# Allegro board scm.brd
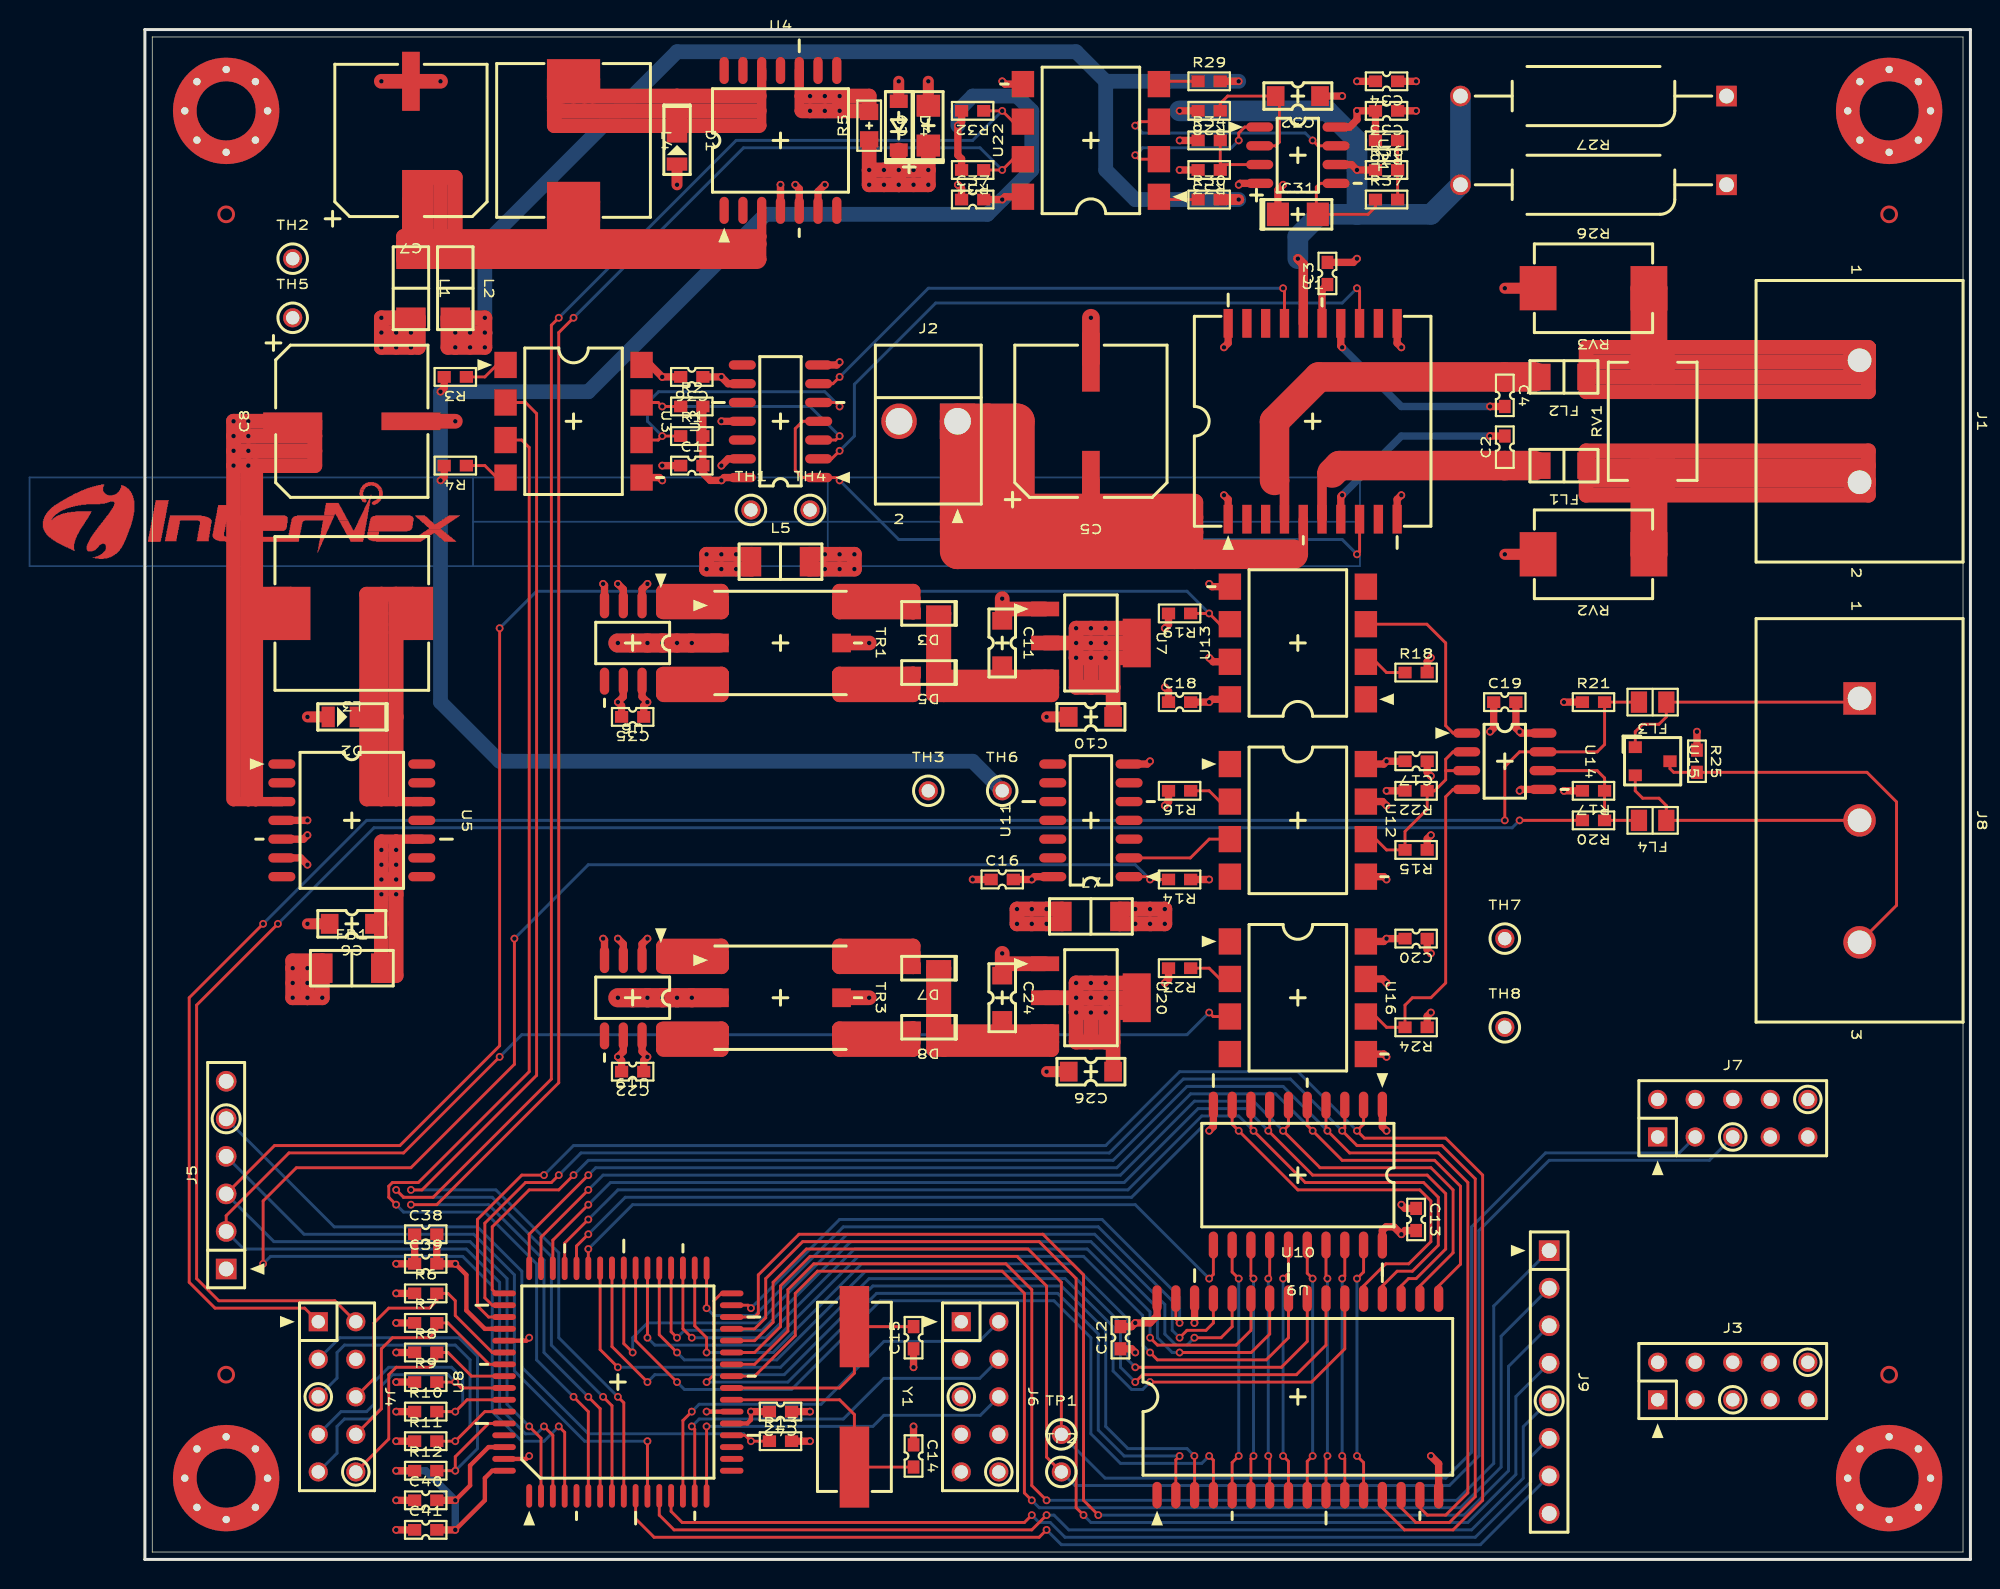
[diagram p0: board, top side]
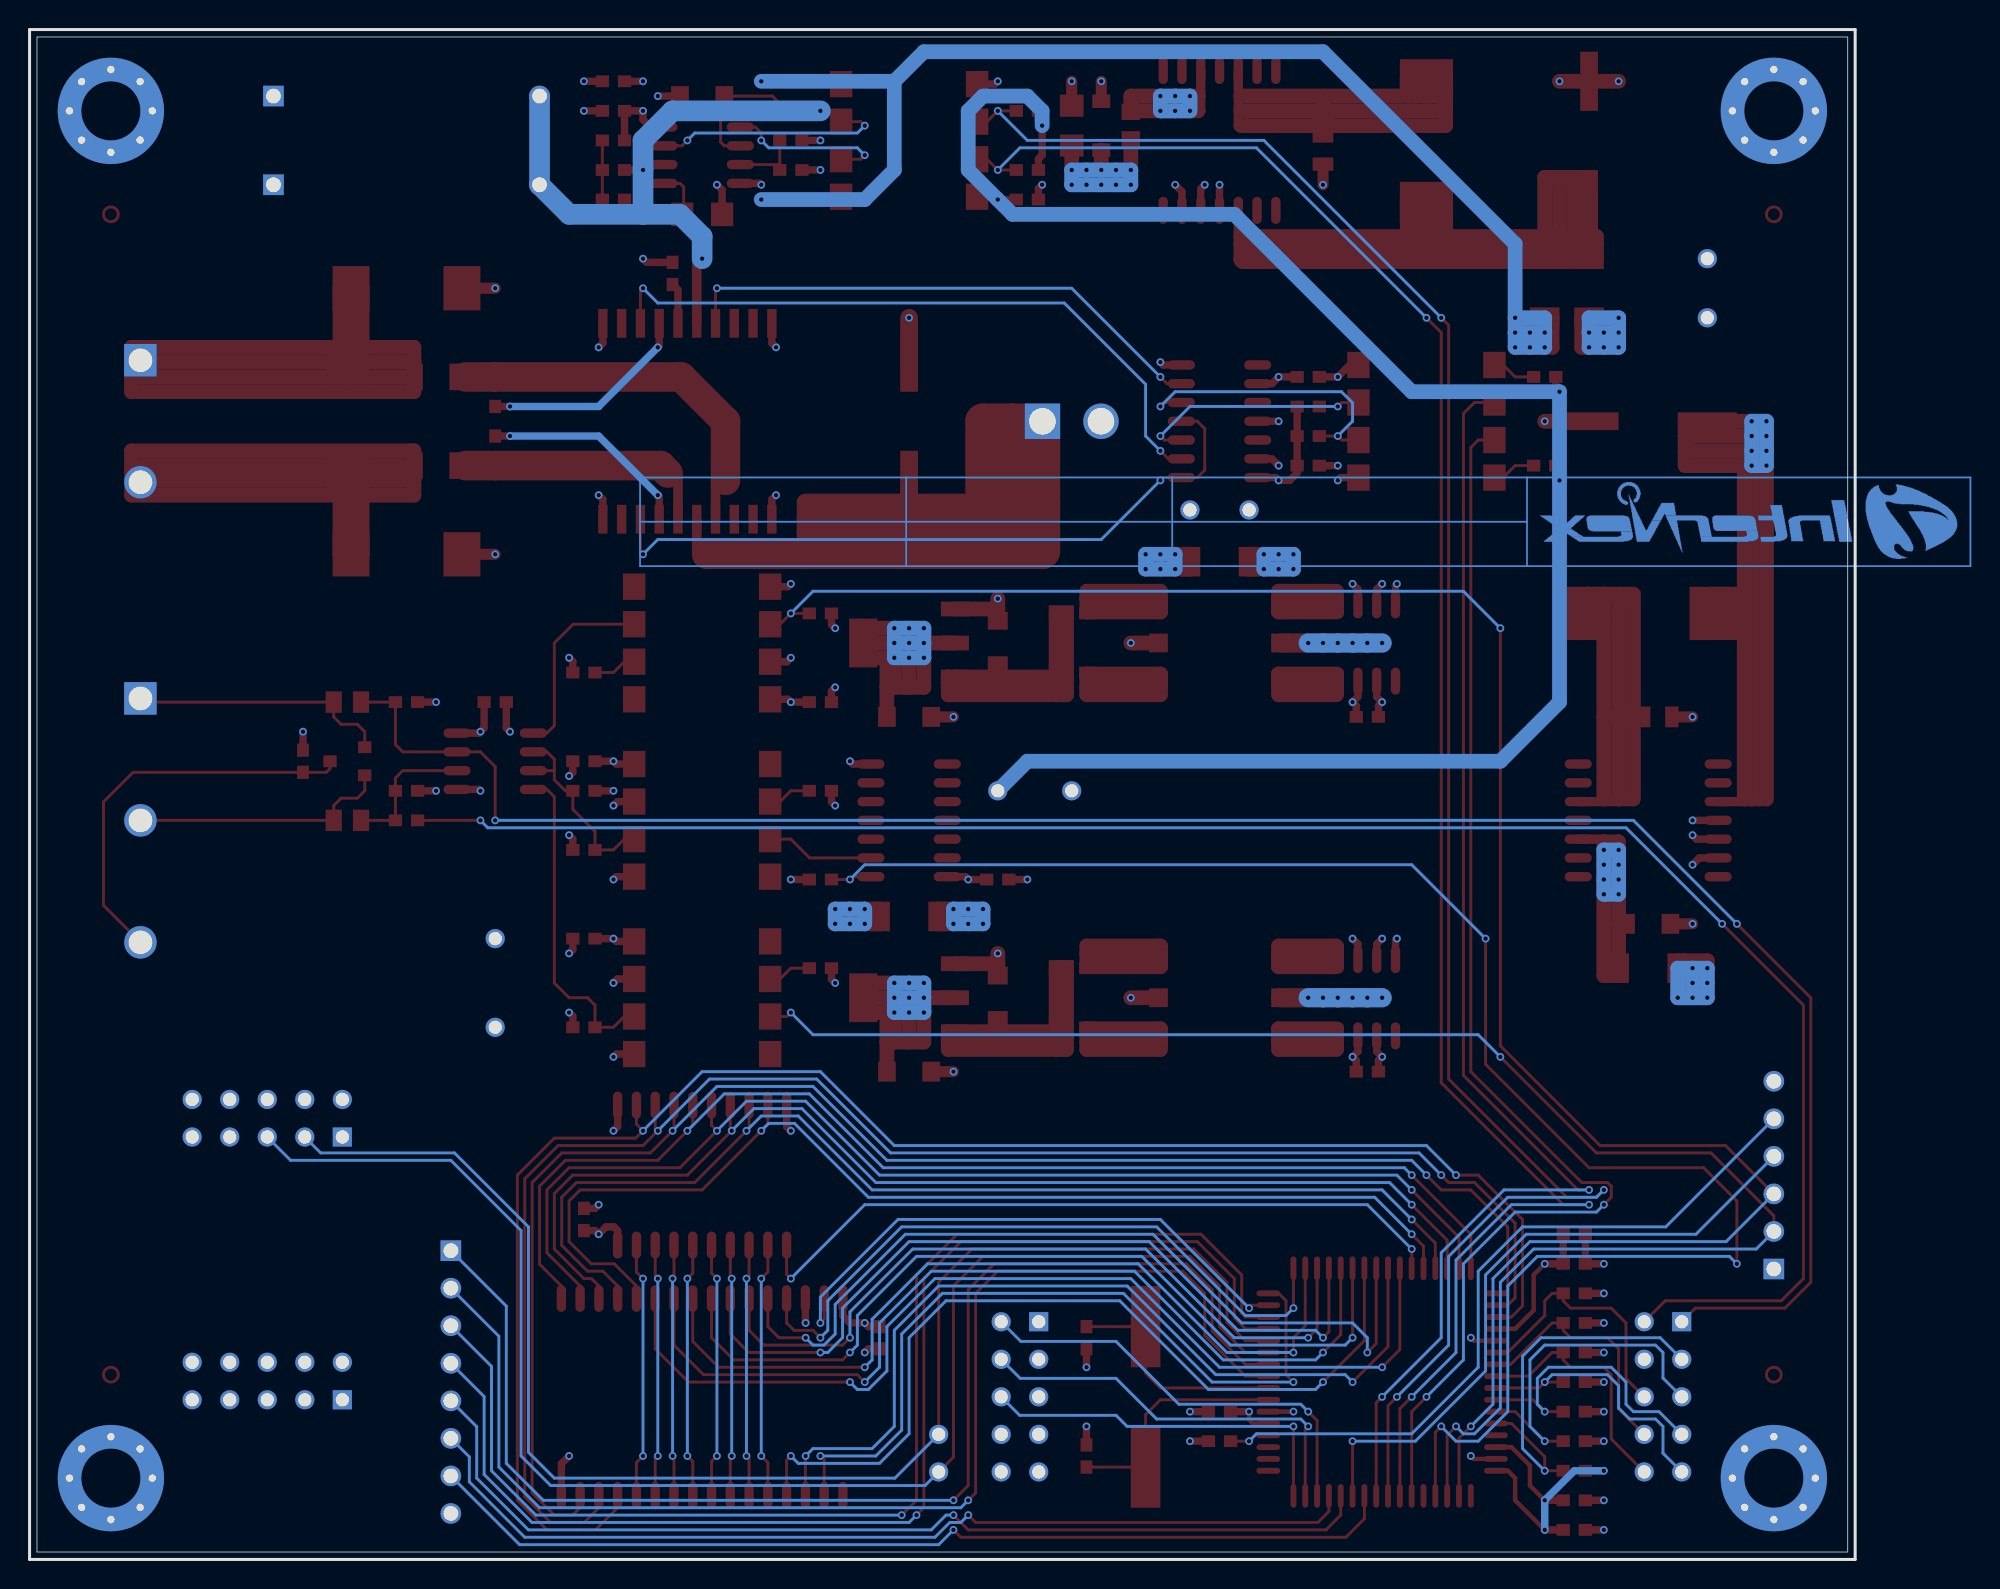
[diagram p1: board, bottom side, seen from below]

Outline 123.5 x 103.5 mm; copper layers: TOP, SIGNAL_2, SIGNAL_3, BOTTOM. Coordinates in mm from the lower left corner of the outline.
Outline path: 0,103.5 0,0 123.5,0 123.5,103.5 0,103.5 ; 0.5,103 123,103 123,0.5 0.5,0.5 0.5,103

## Placement (name value [footprint] x y rotation side)
C1  -  [CC1608]  37 74 0 top
C2  -  [CC1608]  92 75.25 90 top
C3  -  [CC1608]  80 87 90 top
C4  -  [CC1608]  92 78.75 270 top
C5  -  [CAP10D]  64 77 180 top
C6  -  [CC3216]  14 43 180 top
C7  -  [CAP10D]  18 96 180 top
C8  -  [CAP10D]  14 77 90 top
C9  -  [TC3216]  53 97 90 top
C10  -  [CC3216]  64 57 180 top
C11  -  [CC3216]  58 62 270 top
C12  -  [CC1608]  66 15 90 top
C13  -  [CC1608]  86 23 270 top
C14  -  [CC1608]  52 7 270 top
C15  -  [CC1608]  52 15 90 top
C16  -  [CC1608]  58 46 0 top
C17  -  [CC1608]  86 54 180 top
C18  -  [CC1608]  70 58 0 top
C19  -  [CC1608]  92 58 0 top
C20  -  [CC1608]  86 42 180 top
C22  -  [CC1608]  33 33 180 top
C24  -  [CC3216]  58 38 270 top
C26  -  [CC3216]  64 33 180 top
C31  -  [TC3216]  78 91 0 top
C32  -  [CC3216]  78 99 180 top
C33  -  [CC1608]  84 98 180 top
C34  -  [CC1608]  84 100 180 top
C35  -  [CC1608]  33 57 180 top
C36  -  [CC1608]  37 80 180 top
C37  -  [CC1608]  56 92 0 top
C38  -  [CC1608]  19 22 0 top
C39  -  [CC1608]  19 20 0 top
C40  -  [CC1608]  19 4 0 top
C41  -  [CC1608]  19 2 0 top
C42  -  [CC1608]  43 10 180 top
D1  -  [POWERDI123]  36 96 270 top
D2  -  [POWERDI123]  14 57 180 top
D3  -  [MICROSMP]  53 64 180 top
D4  -  [SOD-123]  51 97 270 top
D5  -  [MICROSMP]  53 60 180 top
D7  -  [MICROSMP]  53 40 180 top
D8  -  [MICROSMP]  53 36 180 top
FB1  -  [BEAD4516]  14 40 0 top
FL1  -  [BEAD3216]  96 74 180 top
FL2  -  [BEAD3216]  96 80 180 top
FL3  -  [BEAD2012]  102 58 180 top
FL4  -  [BEAD2012]  102 50 180 top
J1  -  [OSTYK41202030]  116 77 270 top
J2  -  [5273-02]  53 77 0 top
J3  -  [76342-305LF]  107.42 12.07 0 top
J4  -  [76342-305LF]  13 11 270 top
J5  -  [HEADER6_2_5MM_S]  5.5 26 90 top
J6  -  [76342-305LF]  56.5 11 270 top
J7  -  [76342-305LF]  107.42 29.85 0 top
J8  -  [OSTYK41203030]  116 50 270 top
J9  -  [HEADER8]  95 12 270 top
L1  -  [BEAD4516]  18 86 270 top
L2  -  [BEAD4516]  21 86 270 top
L3  -  [B82464A4]  14 64 180 top
L4  -  [B82464A4]  29 96 270 top
L5  -  [BEAD4516]  43 67.5 0 top
L7  -  [BEAD4516]  64 43.5 0 top
MH1  -  [MHOLE3_0]  5.5 98 0 top
MH2  -  [MHOLE3_0]  118 98 0 top
MH3  -  [MHOLE3_0]  5.5 5.5 0 top
MH4  -  [MHOLE3_0]  118 5.5 0 top
NOREF  -  []  118 91 0 top
NOREF#2  -  []  118 12.5 0 top
NOREF#3  -  []  5.5 91 0 top
NOREF#4  -  []  5.5 12.5 0 top
R1  -  [RC1608]  37 76 0 top
R2  -  [RC1608]  37 78 0 top
R3  -  [RC1608]  21 80 180 top
R4  -  [RC1608]  21 74 180 top
R5  -  [RC2012]  49 97 90 top
R6  -  [RC1608]  19 18 0 top
R7  -  [RC1608]  19 16 0 top
R8  -  [RC1608]  19 14 0 top
R9  -  [RC1608]  19 12 0 top
R10  -  [RC1608]  19 10 0 top
R11  -  [RC1608]  19 8 0 top
R12  -  [RC1608]  19 6 0 top
R13  -  [RC1608]  43 8 0 top
R14  -  [RC1608]  70 46 180 top
R15  -  [RC1608]  86 48 180 top
R16  -  [RC1608]  70 52 180 top
R17  -  [RC1608]  98 52 180 top
R18  -  [RC1608]  86 60 0 top
R19  -  [RC1608]  70 64 180 top
R20  -  [RC1608]  98 50 180 top
R21  -  [RC1608]  98 58 0 top
R22  -  [RC1608]  86 52 180 top
R23  -  [RC1608]  70 40 180 top
R24  -  [RC1608]  86 36 180 top
R25  -  [RC1608]  105 54 270 top
R26  -  [MOR-1W]  98 93 180 top
R27  -  [MOR-1W]  98 99 180 top
R28  -  [RC1608]  72 98 180 top
R29  -  [RC1608]  72 100 0 top
R30  -  [RC1608]  72 92 0 top
R31  -  [RC1608]  56 94 180 top
R32  -  [RC1608]  56 98 180 top
R33  -  [RC1608]  72 94 180 top
R34  -  [RC1608]  72 96 0 top
R35  -  [RC1608]  84 96 180 top
R36  -  [RC1608]  84 94 0 top
R37  -  [RC1608]  84 92 0 top
RV1  -  [ERZVF2M]  102 77 90 top
RV2  -  [ERZVF2M]  98 68 180 top
RV3  -  [ERZVF2M]  98 86 180 top
TH1  -  [TP0_9]  41 71 0 top
TH2  -  [TP0_9]  10 88 0 top
TH3  -  [TP0_9]  53 52 0 top
TH4  -  [TP0_9]  45 71 0 top
TH5  -  [TP0_9]  10 84 0 top
TH6  -  [TP0_9]  58 52 0 top
TH7  -  [TP0_9]  92 42 0 top
TH8  -  [TP0_9]  92 36 0 top
TP1  -  [TP0_9]  62 8.46 0 top
TP2  -  [TP0_9]  62 5.92 0 top
TR1  -  [Q4470-CL]  43 62 270 top
TR3  -  [Q4470-CL]  43 38 270 top
U1  -  [POWERSO20]  79 77 0 top
U2  -  [SOP14_3_9_6_1_27]  43 77 90 top
U3  -  [SMD-8]  29 77 270 top
U4  -  [SOP14_7_5_10_3_1_27]  43 96 0 top
U5  -  [SOP14_7_5_10_3_1_27]  14 50 270 top
U6  -  [SOP8_3_9_6_1_27]  33 62 180 top
U7  -  [SOT-223]  64 62 270 top
U8  -  [QFP64_14_16_0_8]  32 12 90 top
U9  -  [SOP20_7_5_10_3_1_27]  78 26 180 top
U10  -  [SOP32_11_4_14_1_1_27]  78 11 0 top
U11  -  [SOP14_3_9_6_1_27]  64 50 90 top
U12  -  [SMD-8]  78 50 270 top
U13  -  [SMD-8]  78 62 90 top
U14  -  [SOP8_3_9_6_1_27]  92 54 270 top
U15  -  [SOT-23]  102 54 270 top
U16  -  [SMD-8]  78 38 270 top
U19  -  [SOP8_3_9_6_1_27]  33 38 180 top
U20  -  [SOT-223]  64 38 270 top
U21  -  [SOP8_3_9_6_1_27]  78 95 270 top
U22  -  [SMD-8]  64 96 90 top
Y1  -  [SX-1]  48 11 270 top

## Library data of the parts
C1 C12 C13 C16-C20 C22 C33-C42 = 0_1U_0603: alternate symbols: (B:CC1608_ALT)
C2 C4 = 10N_0603: alternate symbols: (B:CC1608_ALT)
C3 = 220N_0603: alternate symbols: (B:CC1608_ALT)
C5 C7 C8 = EEE-1VA331P: alternate symbols: (B:CAP10D_ALT)
C6 = 22UF_1206: alternate symbols: (B:CC3216_ALT)
C9 = TANTAL_6_8UF_3216: alternate symbols: (B:TC3216_ALT)
C10 C11 C24 C26 C32 = 10U_1206: alternate symbols: (B:CC3216_ALT)
C14 C15 = 15P_0603: alternate symbols: (B:CC1608_ALT)
C31 = TCSCS1C685MAAR: alternate symbols: (B:TC3216_ALT)
D1 D2 = DFLS160-7: alternate symbols: (B:POWERDI123_ALT)
D3 D5 D7 D8 = MSS1P2L-M3_89A: alternate symbols: (B:MICROSMP_ALT)
D4 = MMSZ4699T1G_12V: alternate symbols: (B:SOD-123_ALT)
FB1 = BLM41PG181SN1: alternate symbols: (B:BEAD4516_ALT)
FL1 FL2 = BLM31PG601SN1L: alternate symbols: (B:BEAD3216_ALT)
FL3 FL4 = MMZ2012R150A: alternate symbols: (B:BEAD2012_ALT)
J1 = OSTYK41202030: alternate symbols: (B:OSTYK41202030_ALT)
J2 = 09-65-2028: alternate symbols: (B:5273-02_ALT)
J3 J4 J6 J7 = 76342-305LF: alternate symbols: (B:76342-305LF_ALT)
J5 = PH01_2_54_-SS40P-11_5MM: alternate symbols: (B:HEADER6_2_5MM_S_ALT)
J8 = OSTYK41203030: alternate symbols: (B:OSTYK41203030_ALT)
J9 = HEADER_2_54MM_DNI: alternate symbols: (B:HEADER8_ALT)
L1 L2 L5 L7 = BLM41PG750SN1: alternate symbols: (B:BEAD4516_ALT)
L3 L4 = B82464A4474K: alternate symbols: (B:B82464A4_ALT)
MH1-MH4 = HOLE_MOUNT: alternate symbols: (B:MHOLE3_0_ALT)
R1 R2 R15 R17 R19 R21 R22 R24 R31 R32 = 4_7K_0603: alternate symbols: (B:RC1608_ALT)
R3 R4 R16 R18 R23 R29 R30 = 470_0603: alternate symbols: (B:RC1608_ALT)
R5 = 2_7K_0805: alternate symbols: (B:RC2012_ALT)
R6-R14 R28 R37 = 10K_0603: alternate symbols: (B:RC1608_ALT)
R20 = 120_0603: alternate symbols: (B:RC1608_ALT)
R25 = 0_0603: alternate symbols: (B:RC1608_ALT)
R26 R27 = MOR_1W_5__1OHM: alternate symbols: (B:MOR-1W_ALT)
R33 = 16K_0603: alternate symbols: (B:RC1608_ALT)
R34 = 1K_0603: alternate symbols: (B:RC1608_ALT)
R35 = 47K_0603: alternate symbols: (B:RC1608_ALT)
R36 = 200_0603: alternate symbols: (B:RC1608_ALT)
RV1-RV3 = ERZVF2M470: alternate symbols: (B:ERZVF2M_ALT)
TH1-TH3 TH7 = GND: alternate symbols: (B:TP0_9_ALT)
TH4 = SMPS24V: alternate symbols: (B:TP0_9_ALT)
TH5 = 5VP_IN: alternate symbols: (B:TP0_9_ALT)
TH6 = 5VL1: alternate symbols: (B:TP0_9_ALT)
TH8 = 5VL3: alternate symbols: (B:TP0_9_ALT)
TP1 = TXD: alternate symbols: (B:TP0_9_ALT)
TP2 = RXD: alternate symbols: (B:TP0_9_ALT)
TR1 TR3 = Q4470-CL: alternate symbols: (B:Q4470-CL_ALT)
U1 = L6201PS_POWERSO20: alternate symbols: (B:POWERSO20_ALT)
U2 U11 = MM74HC04M: alternate symbols: (B:SOP14_3_9_6_1_27_ALT)
U3 U22 = HCPL2630S: alternate symbols: (B:SMD-8_ALT)
U4 U5 = LM2574HVM-5_0: alternate symbols: (B:SOP14_7_5_10_3_1_27_ALT)
U6 U19 = MAX253ESA: alternate symbols: (B:SOP8_3_9_6_1_27_ALT)
U7 U20 = LM1117IMPX-5_0: alternate symbols: (B:SOT-223_ALT)
U8 = ATMEGA128-16AU: alternate symbols: (B:QFP64_14_16_0_8_ALT)
U9 = SN74HC573ADW: alternate symbols: (B:SOP20_7_5_10_3_1_27_ALT)
U10 = R1LP0108ESP-7SI_B0: alternate symbols: (B:SOP32_11_4_14_1_1_27_ALT)
U12 U13 U16 = 6N137S: alternate symbols: (B:SMD-8_ALT)
U14 = SN65176BD: alternate symbols: (B:SOP8_3_9_6_1_27_ALT)
U15 = SM712-TP: alternate symbols: (B:SOT-23_ALT)
U21 = LM2903D_SOIC: alternate symbols: (B:SOP8_3_9_6_1_27_ALT)
Y1 = SX-1_8MHZ_: alternate symbols: (B:SX-1_ALT)

## Footprints (pads in the part's own frame, mm; a bottom-side part is the same pattern mirrored in y, then rotated)
5273-02
  rect 2.4x2.4 hole 1.8: 1(1.98,0)
  round 2.4 hole 1.8: 2(-1.98,0)
76342-305LF
  rect 1.3x1.3 hole 0.9: 1(-5.08,-1.27)
  round 1.3 hole 0.9: 2(-5.08,1.27) 3(-2.54,-1.27) 4(-2.54,1.27) 5(0,-1.27) 6(0,1.27) 7(2.54,-1.27) 8(2.54,1.27) 9(5.08,-1.27) 10(5.08,1.27)
B82464A4
  rect 2.7x3.6 smd: 1(-4.15,0) 2(4.15,0)
BEAD2012
  rect 1.1x1.45 smd: 1(-0.925,0) 2(0.925,0)
BEAD3216
  rect 1.2x1.8 smd: 1(-1.5,0) 2(1.5,0)
BEAD4516
  rect 1.3x2 smd: 1(-1.95,0) 2(1.95,0)
CAP10D
  rect 1.2x4 smd: 1(0,4) 2(0,-4)
CC1608
  rect 0.9x0.8 smd: 1(-0.75,0) 2(0.75,0)
CC3216
  rect 1.2x1.35 smd: 1(-1.5,0) 2(1.5,0)
ERZVF2M
  rect 2.5x3 smd: 1(-3.75,0) 2(3.75,0)
HEADER6_2_5MM_S
  rect 1.4x1.4 hole 1: 1(-6.35,0)
  round 1.4 hole 1: 2(-3.81,0) 3(-1.27,0) 4(1.27,0) 5(3.81,0) 6(6.35,0)
HEADER8
  rect 1.4x1.4 hole 1: 1(-8.89,0)
  round 1.4 hole 1: 2(-6.35,0) 3(-3.81,0) 4(-1.27,0) 5(1.27,0) 6(3.81,0) 7(6.35,0) 8(8.89,0)
MHOLE3_0
  round 0.9 hole 0.5: 1(2.8,0) 2(1.98,1.98) 3(0,2.8) 4(-1.98,1.98) 5(-2.8,0) 6(-1.98,-1.98) 7(0,-2.8) 8(1.98,-1.98)
MICROSMP
  rect 1.7x1.1 smd: 1(-0.7,0)
  rect 1.05x0.8 smd: 2(1.025,0)
MOR-1W
  rect 1.4x1.4 hole 1: 1(-9,0)
  round 1.4 hole 1: 2(9,0)
OSTYK41202030
  rect 2.2x2.2 hole 1.6: 1(-4.125,0)
  round 2.2 hole 1.6: 2(4.125,0)
OSTYK41203030
  rect 2.2x2.2 hole 1.6: 1(-8.25,0)
  round 2.2 hole 1.6: 2(0,0) 3(8.25,0)
POWERDI123
  rect 0.9x1.4 smd: 1(1.6,0)
  rect 2.2x1.4 smd: 2(-0.95,0)
POWERSO20
  rect 0.635x1.95 smd: 1(-5.715,-6.625) 2(-4.445,-6.625) 3(-3.175,-6.625) 4(-1.905,-6.625) 5(-0.635,-6.625) 6(0.635,-6.625) 7(1.905,-6.625) 8(3.175,-6.625) 9(4.445,-6.625) 10(5.715,-6.625) 11(5.715,6.625) 12(4.445,6.625) 13(3.175,6.625) 14(1.905,6.625) 15(0.635,6.625) 16(-0.635,6.625) 17(-1.905,6.625) 18(-3.175,6.625) 19(-4.445,6.625) 20(-5.715,6.625)
Q4470-CL
  rect 1.27x1.27 smd: 1(-2.54,-4.13) 2(0,-4.13) 3(2.54,-4.13) 4(2.54,4.13) 5(0,4.13) 6(-2.54,4.13)
QFP64_14_16_0_8
  oval 1.6x0.4 smd: 1(-7.7,6) 2(-7.7,5.2) 3(-7.7,4.4) 4(-7.7,3.6) 5(-7.7,2.8) 6(-7.7,2) 7(-7.7,1.2) 8(-7.7,0.4) 9(-7.7,-0.4) 10(-7.7,-1.2) 11(-7.7,-2) 12(-7.7,-2.8) 13(-7.7,-3.6) 14(-7.7,-4.4) 15(-7.7,-5.2) 16(-7.7,-6) 33(7.7,-6) 34(7.7,-5.2) 35(7.7,-4.4) 36(7.7,-3.6) 37(7.7,-2.8) 38(7.7,-2) 39(7.7,-1.2) 40(7.7,-0.4) 41(7.7,0.4) 42(7.7,1.2) 43(7.7,2) 44(7.7,2.8) 45(7.7,3.6) 46(7.7,4.4) 47(7.7,5.2) 48(7.7,6)
  oval 0.4x1.6 smd: 17(-6,-7.7) 18(-5.2,-7.7) 19(-4.4,-7.7) 20(-3.6,-7.7) 21(-2.8,-7.7) 22(-2,-7.7) 23(-1.2,-7.7) 24(-0.4,-7.7) 25(0.4,-7.7) 26(1.2,-7.7) 27(2,-7.7) 28(2.8,-7.7) 29(3.6,-7.7) 30(4.4,-7.7) 31(5.2,-7.7) 32(6,-7.7) 49(6,7.7) 50(5.2,7.7) 51(4.4,7.7) 52(3.6,7.7) 53(2.8,7.7) 54(2,7.7) 55(1.2,7.7) 56(0.4,7.7) 57(-0.4,7.7) 58(-1.2,7.7) 59(-2,7.7) 60(-2.8,7.7) 61(-3.6,7.7) 62(-4.4,7.7) 63(-5.2,7.7) 64(-6,7.7)
RC1608
  rect 0.9x0.8 smd: 1(-0.75,0) 2(0.75,0)
RC2012
  rect 1.1x1.25 smd: 1(-0.925,0) 2(0.925,0)
SMD-8
  rect 1.78x1.52 smd: 1(-3.81,-4.6) 2(-1.27,-4.6) 3(1.27,-4.6) 4(3.81,-4.6) 5(3.81,4.6) 6(1.27,4.6) 7(-1.27,4.6) 8(-3.81,4.6)
SOD-123
  rect 0.91x1.22 smd: 1(-1.65,0) 2(1.65,0)
SOP8_3_9_6_1_27
  oval 0.635x1.835 smd: 1(-1.905,-2.583) 2(-0.635,-2.583) 3(0.635,-2.583) 4(1.905,-2.583) 5(1.905,2.583) 6(0.635,2.583) 7(-0.635,2.583) 8(-1.905,2.583)
SOP14_3_9_6_1_27
  oval 0.635x1.835 smd: 1(-3.81,-2.583) 2(-2.54,-2.583) 3(-1.27,-2.583) 4(0,-2.583) 5(1.27,-2.583) 6(2.54,-2.583) 7(3.81,-2.583) 8(3.81,2.583) 9(2.54,2.583) 10(1.27,2.583) 11(0,2.583) 12(-1.27,2.583) 13(-2.54,2.583) 14(-3.81,2.583)
SOP14_7_5_10_3_1_27
  oval 0.635x1.835 smd: 1(-3.81,-4.732) 2(-2.54,-4.732) 3(-1.27,-4.732) 4(0,-4.732) 5(1.27,-4.732) 6(2.54,-4.732) 7(3.81,-4.732) 8(3.81,4.732) 9(2.54,4.732) 10(1.27,4.732) 11(0,4.732) 12(-1.27,4.732) 13(-2.54,4.732) 14(-3.81,4.732)
SOP20_7_5_10_3_1_27
  oval 0.635x1.835 smd: 1(-5.715,-4.732) 2(-4.445,-4.732) 3(-3.175,-4.732) 4(-1.905,-4.732) 5(-0.635,-4.732) 6(0.635,-4.732) 7(1.905,-4.732) 8(3.175,-4.732) 9(4.445,-4.732) 10(5.715,-4.732) 11(5.715,4.732) 12(4.445,4.732) 13(3.175,4.732) 14(1.905,4.732) 15(0.635,4.732) 16(-0.635,4.732) 17(-1.905,4.732) 18(-3.175,4.732) 19(-4.445,4.732) 20(-5.715,4.732)
SOP32_11_4_14_1_1_27
  oval 0.635x1.8 smd: 1(-9.525,-6.65) 2(-8.255,-6.65) 3(-6.985,-6.65) 4(-5.715,-6.65) 5(-4.445,-6.65) 6(-3.175,-6.65) 7(-1.905,-6.65) 8(-0.635,-6.65) 9(0.635,-6.65) 10(1.905,-6.65) 11(3.175,-6.65) 12(4.445,-6.65) 13(5.715,-6.65) 14(6.985,-6.65) 15(8.255,-6.65) 16(9.525,-6.65) 17(9.525,6.65) 18(8.255,6.65) 19(6.985,6.65) 20(5.715,6.65) 21(4.445,6.65) 22(3.175,6.65) 23(1.905,6.65) 24(0.635,6.65) 25(-0.635,6.65) 26(-1.905,6.65) 27(-3.175,6.65) 28(-4.445,6.65) 29(-5.715,6.65) 30(-6.985,6.65) 31(-8.255,6.65) 32(-9.525,6.65)
SOT-23
  rect 0.8x0.9 smd: 1(-0.95,-1.175) 2(0.95,-1.175) 3(0,1.175)
SOT-223
  rect 1x1.9 smd: 1(-2.3,-3.1) 2(0,-3.1) 3(2.3,-3.1)
  rect 3.3x1.9 smd: 4(0,3.1)
SX-1
  rect 5.5x2 smd: 1(-4.75,0) 2(4.75,0)
TC3216
  rect 1.5x1.6 smd: 1(-1.35,0) 2(1.35,0)
TP0_9
  round 1.3 hole 0.9: 1(0,0)

## Nets
5VL1: C10.1 C12.2 C13.2 C16.2 C18.2 C37.2 C38.2 C39.2 C40.2 C41.2 C42.2 J5.1 J6.1 R3.2 R4.2 R6.1 R7.1 R8.1 R9.1 R10.1 R11.1 R12.1 R13.2 R16.2 R19.2 R23.2 R31.2 R32.2 TH6.1 U7.2 U7.4 U8.21 U8.52 U8.62 U8.64 U9.20 U10.30 U10.32 U11.14 U13.7 U13.8 U22.8
5VL3: C17.2 C19.2 C20.2 C26.1 R15.1 R17.2 R18.2 R22.2 R24.1 TH8.1 U12.7 U12.8 U14.8 U16.7 U16.8 U20.2 U20.4
5VM: C1.2 C22.2 C35.2 C36.2 L2.2 R1.2 R2.2 R29.2 R30.2 TR1.2 TR3.2 U2.14 U3.8 U6.6 U19.6
5VP_IN: C8.1 J3.3 J3.5 J3.7 L1.2 L3.2 TH5.1 U5.3
12VM: C9.1 C31.1 C33.2 C34.2 D4.2 R5.1 R33.2 R35.2 U21.8
0: C1.1 C3.2 C5.2 C6.2 C7.2 C8.2 C9.2 C22.1 C32.1 C33.1 C34.1 C35.1 C36.1 C37.1 D1.1 D2.1 D4.1 J2.2 L5.1 R26.1 R27.1 R34.1 RV2.2 RV3.2 TH1.1 TH2.1 U1.1 U1.10 U1.11 U1.20 U2.7 U2.9 U2.11 U2.13 U3.5 U4.4 U4.5 U4.6 U5.4 U5.5 U5.6 U6.2 U6.3 U6.4 U6.7 U19.2 U19.3 U19.4 U19.7 U21.4 U22.5
1: C10.2 C11.1 C12.1 C13.1 C14.1 C15.1 C16.1 C18.1 C38.1 C39.1 C40.1 C41.1 C42.1 J3.1 J3.2 J3.4 J3.6 J3.8 J3.9 J3.10 J5.6 J6.9 J7.1 J7.2 J7.4 J7.6 J7.7 J7.8 J7.9 J7.10 J9.8 L5.2 L7.1 R14.1 TH3.1 TR1.5 U7.1 U8.22 U8.53 U8.63 U9.1 U9.10 U10.16 U11.7 U13.5
3: C17.1 C19.1 C20.1 C24.1 C26.2 L7.2 R21.1 R25.1 TH7.1 TR3.5 U12.5 U14.5 U16.5 U20.1
485_EN_MASTER: R14.2 U8.4 U11.1
485_RX_MASTER: J5.3 R19.1 U8.2 U13.6
485_TERM_N: FL3.2 J4.1 R21.2 U14.7
485_TERM_P: J4.2 R20.2
485_TX_MASTER: J5.2 U8.3 U16.3
A8: U8.35 U10.27
A9: U8.36 U10.26
A10: U8.37 U10.23
A11: U8.38 U10.25
A12: U8.39 U10.4
A13: U8.40 U10.28
A14: U8.41 U10.3
A15: U8.42 U10.22
CURRENT_SEN: R31.1 U8.7 U22.7
D0: U8.51 U9.2 U10.13
D1: U8.50 U9.3 U10.14
D2: U8.49 U9.4 U10.15
D3: U8.48 U9.5 U10.17
D4: U8.47 U9.6 U10.18
D5: U8.46 U9.7 U10.19
D6: U8.45 U9.8 U10.20
D7: U8.44 U9.9 U10.21
PLC_EN: U3.3 U8.6
PLC_RX: R32.1 U8.8 U22.6
PLC_TX: U3.2 U8.9
RESERVED0: J9.1 U8.26
RESERVED1: J9.2 U8.25
RESERVED2: J9.3 U8.30
RESERVED3: J9.4 U8.29
RESERVED4: J9.5 U8.12
RESERVED5: J9.6 U8.13
RESERVED6: J9.7 U8.10
RXD: J7.5 TP2.1 U8.27
SMPS24V: C5.1 FB1.1 J2.1 R5.2 TH4.1 U1.5 U4.10
TXD: J7.3 TP1.1 U8.28
N09389: D3.2 TR1.6
N09392: D5.2 TR1.4
N09528: C11.2 D3.1 D5.1 U7.3
N35390: U9.19 U10.12
N35393: U9.18 U10.11
N35399: U9.17 U10.10
N35402: U9.16 U10.9
N35405: U9.15 U10.8
N35408: U9.14 U10.7
N35411: U9.13 U10.6
N35414: U9.12 U10.5
N35443: U8.43 U9.11
N35464: U8.31 U10.31
N38547: U8.33 U10.29
N38727: U8.34 U10.24
N39169: U8.32 U10.2
N10841551: FL2.1 J1.1 RV1.2 RV3.1
N10842146: FL1.1 J1.2 RV1.1 RV2.1
N10844937: C2.1 FL1.2 U1.6
N10844940: C4.1 FL2.2 U1.4
N10846204: U1.8 U2.1 U2.4
N10847524: C2.2 U1.7
N10847531: C4.2 U1.14
N10852000: R1.1 U2.5 U3.6
N10855610: U1.13 U2.2
N10855613: U1.17 U2.6
N10855616: C3.1 U1.15
N10857224: D1.2 L4.1 U4.12
N10857508: C7.1 L1.1 L2.1 L4.2 U4.3
N10865568: R2.1 U2.3 U3.7
N10867072: R3.1 U3.1
N10870573: TR1.1 U6.1
N10870576: TR1.3 U6.8
N10877738: C14.2 U8.23 Y1.2
N10877750: C15.2 U8.24 Y1.1
N10878472: J5.5 R13.1 U8.20
N10878665: J5.4 U8.11
N10882240: D8.2 TR3.4
N10882264: C24.2 D7.1 D8.1 U20.3
N10882308: TR3.3 U19.8
N10882312: D7.2 TR3.6
N10882400: TR3.1 U19.1
N10895652: R24.2 U14.4 U16.6
N10895660: U13.3 U14.1
N10895700: R18.1 U13.2
N10895720: R15.2 R22.1 U12.6 U14.2 U14.3
N10895736: R23.1 U16.2
N10895740: J8.3 R25.2 U15.3
N10895768: FL4.2 R17.1 R20.1 U14.6
N10895776: FL3.1 J8.1 U15.1
N10895804: FL4.1 J8.2 U15.2
N10895892: R16.1 U12.2
N10899790: U11.2 U12.3
N10905190: J6.2 U8.14
N10905845: J6.4 U8.15
N10905855: J6.6 U8.16
N10912524: J4.3 R12.2 U8.60
N10912530: J4.5 R11.2 U8.59
N10912536: J4.7 R10.2 U8.58
N10912542: J4.9 R9.2 U8.57
N10912548: J4.10 R8.2 U8.56
N10912554: J4.8 R7.2 U8.55
N10912561: J4.6 R6.2 U8.54
N10952342: R4.1 U3.4
N10987418: C6.1 FB1.2 U5.10
N10987474: D2.2 L3.1 U5.12
N11012209: U21.7 U22.3
N11012213: R29.1 U22.4
N11012385: R30.1 U22.1
N11012421: U21.1 U22.2
N11012477: R33.1 R34.2 U21.3
N11012557: R26.2 R27.2 R28.2 R36.1 U1.16 U21.6
N11012561: C31.2 R37.1 U21.5
N11012633: R35.1 R36.2 R37.2
N11012693: C32.2 R28.1 U21.2

Pads without a net: J4 4; J6 3 5 7 8 10; MH1 1 2 3 4 5 6 7 8; MH2 1 2 3 4 5 6 7 8; MH3 1 2 3 4 5 6 7 8; MH4 1 2 3 4 5 6 7 8; U1 2 3 9 12 18 19; U2 8 10 12; U4 1 2 7 8 9 11 13 14; U5 1 2 7 8 9 11 13 14; U6 5; U8 1 5 17 18 19 61; U10 1; U11 3 4 5 6 8 9 10 11 12 13; U12 1 4; U13 1 4; U16 1 4; U19 5

## Via types
v1: diameter 0.53, hole 0.3, TOP to BOTTOM, 349 vias

## Routing (per net, layer and track width the routed paths; a pad name or vN(x,y) marks a point on that pad's centre or on a via; arc(x,y) is an arc through that point)
5VL1: length 242
  TOP w0.3: v1(21,20) 21.75,19.25 21.75,16.85 23,15.6 U8.52 ; v1(41,10) 41,9.45 40.75,9.2 U8.21 ; v1(21,4) 22,5 22,6.35 23.25,7.6 U8.62 ; U8.64 23.5,6 23,5.5 23,4 v1(21,2)
  TOP w0.5: R7.1 v1(17,16) ; R8.1 v1(17,14) ; U13.8 72.19,58.19 v1(72,58) C18.2 ; R6.1 v1(17,18) ; U10.32 68.47,16.48 68,16 v1(67,16) 66.75,15.75 C12.2 ; R9.1 v1(17,12) ; U11.14 60.19,46.19 v1(60,46) C16.2 ; v1(20,73) 20.25,73.25 R4.2 ; C42.2 v1(41,10) ; R23.2 69.25,39.25 v1(69,39) ; C38.2 C39.2 v1(21,20) ; C37.2 v1(58,92) 58.19,92.19 U22.8 ; R31.2 55.25,94.75 55,95 v1(55,97) 55.25,97.25 R32.2 ; R16.2 69.25,51.25 v1(69,51) ; v1(69,63) 69.25,63.25 R19.2 ; U9.20 83.72,22.25 83.97,22.5 84.5,22.5 v1(85,22) 85.25,22.25 C13.2 ; R11.1 v1(17,8) ; v1(20,79) 20.25,79.25 R3.2 ; v1(71,16) 71.02,16.02 U10.30 ; v1(72,61) 72.27,60.73 U13.7 ; R13.2 v1(45,8) ; R12.1 v1(17,6) ; C41.2 v1(21,2) ; C40.2 v1(21,4) ; R10.1 v1(17,10)
  TOP w1: v1(65,61) 65,59 ; v1(65,61) 65.5,61 ; v1(65,61) v1(64,61) ; 65,59 64,59 ; 65,59 65.5,59 ; 64,59 v1(64,61) ; 64,59 63,59 v1(63,61) ; v1(64,61) v1(63,61) ; U7.4 67.1,61 65.5,61 ; U7.4 v1(65,62) v1(64,62) v1(63,62) ; U7.4 67.1,63 v1(65,63) v1(64,63) v1(63,63) v1(63,62) ; 65.5,61 65.5,59 ; 65.5,59 C10.1 ; U7.2 v1(63,62) ; v1(63,62) v1(63,61)
  SIGNAL_3 w0.75: J6.1 55.23,17.08 ; J6.1 55.23,15.08 ; J6.1 56.23,16.08 ; J6.1 54.23,16.08 ; 5.5,20.7 J5.1 6.55,19.65 ; TH6.1 57,52 ; TH6.1 58,51 ; TH6.1 58,53 ; TH6.1 59,52
  BOTTOM w0.5: v1(21,2) v1(21,4) 19,6 v1(17,6)
  BOTTOM w1: v1(63,62) v1(63,61) v1(64,61) v1(65,61) v1(65,62) ; v1(63,62) v1(64,62) v1(65,62) ; v1(63,62) v1(63,63) v1(64,63) v1(65,63) v1(65,62) ; v1(55,97) 55,98 56,99 59,99 60,98 60,94 v1(58,92) 57,91 42,91 30,79 v1(20,79) v1(20,73) 20,58 24,54 56,54 TH6.1
5VL3: length 62.9
  TOP w0.5: v1(84,39) 83.73,39.27 U16.7 ; C17.2 v1(84,54) 83.81,53.81 U12.8 ; v1(84,51) 83.73,51.27 U12.7 ; R18.2 86.75,60.75 v1(87,61) ; v1(87,49) 86.75,48.75 R15.1 ; U16.8 83.81,41.81 v1(84,42) C20.2 ; C19.2 92.75,56.25 v1(93,56) 93.09,55.91 U14.8 ; v1(87,37) 86.75,36.75 R24.1 ; v1(84,52) R22.2 ; R17.2 v1(96,52)
  TOP w1: 65,35 64,35 ; 65,35 v1(65,37) ; 65,35 65.5,35 ; 64,35 v1(64,37) ; 64,35 63,35 v1(63,37) ; v1(65,37) 65.5,37 ; v1(65,37) v1(64,37) ; 65.5,37 67.1,37 U20.4 ; 65.5,37 65.5,35 ; v1(64,37) v1(63,37) ; v1(63,38) v1(64,38) v1(65,38) U20.4 ; v1(63,38) U20.2 ; v1(63,38) v1(63,37) ; v1(63,38) v1(63,39) v1(64,39) v1(65,39) 67.1,39 U20.4 ; 65.5,35 C26.1
  SIGNAL_3 w0.75: TH8.1 92,37 ; TH8.1 93,36 ; TH8.1 92,35 ; TH8.1 91,36
  BOTTOM w1: v1(63,38) v1(64,38) v1(65,38) ; v1(63,38) v1(63,39) v1(64,39) v1(65,39) v1(65,38) ; v1(63,38) v1(63,37) v1(64,37) v1(65,37) v1(65,38)
5VM: length 414.1
  TOP w0.5: R2.2 R1.2 C1.2 37.75,73.5 38.25,73 v1(39,73) 39.19,73.19 U2.14 ; U19.6 32.37,34.37 v1(32,34) 32.25,33.75 C22.2 ; C35.2 32.25,57.75 v1(32,58) 32.37,58.37 U6.6 ; U3.8 34.19,80.81 v1(35,80) C36.2 ; R29.2 v1(74,100)
  TOP w0.75: R30.2 v1(74,92)
  TOP w1: v1(23,83) v1(22,83) 21.5,83 ; v1(23,83) v1(23,82) v1(22,82) v1(21,82) ; v1(23,83) v1(23,84) 21.5,84 ; v1(21,82) 20.5,82 20.5,84 21,84 ; v1(21,82) v1(21,83) ; v1(21,83) 21.5,83 ; v1(21,83) 21,84 ; 21,84 21.5,84 ; 21,84 L2.2 ; 21.5,84 21.5,83
  TOP w1.3: TR1.2 v1(37,62) v1(36,62) v1(35,62) v1(34,62) v1(33,62) v1(32,62) ; TR3.2 v1(37,38) v1(36,38) v1(35,38) v1(34,38) v1(33,38) v1(32,38)
  SIGNAL_3 w0.12: 64.2,67.2 46.2,67.2 ; 64.2,67.2 64.2,73.2 ; 64.2,67.2 82.2,67.2 82.2,70.2 ; 46.2,67.2 22.2,67.2 ; 46.2,67.2 46.2,73.2 ; 64.2,73.2 82.2,73.2 82.2,70.2 ; 64.2,73.2 46.2,73.2 ; 22.2,67.2 -7.8,67.2 -7.8,73.2 22.2,73.2 ; 22.2,67.2 22.2,70.2 ; 22.2,70.2 82.2,70.2 ; 22.2,70.2 22.2,73.2 ; 22.2,73.2 46.2,73.2
  BOTTOM w1: 65,100 63,102 36,102 23,89 v1(23,84) ; 65,100 v1(74,100) ; 65,100 65,94 67,92 v1(74,92) ; v1(21,83) 21,84 v1(23,84) ; v1(21,83) v1(22,83) v1(23,83) ; v1(21,83) v1(21,82) v1(22,82) v1(23,82) v1(23,83) ; v1(23,84) v1(23,83)
  BOTTOM w1.3: v1(37,38) v1(36,38) v1(35,38) v1(34,38) v1(33,38) v1(32,38) ; v1(37,62) v1(36,62) v1(35,62) v1(34,62) v1(33,62) v1(32,62)
5VP_IN: length 161.9
  TOP w0.635: 6,51.45 6,51.27 7,51.27 ; 7.5,51.27 7.5,51.45 ; 7.5,51.27 U5.3 ; 7.5,51.27 7,51.27 ; 7,51.27 7,51.45
  TOP w1: v1(6,76) v1(6,75) ; v1(6,76) v1(7,76) 11.5,76 ; v1(6,76) v1(6,77) v1(7,77) C8.1 11.5,77 11.5,76 ; v1(6,75) v1(6,74) ; v1(6,75) v1(7,75) 11.5,75 ; 9.85,63.25 9.85,62.7 7.5,62.7 ; 9.85,63.25 7.5,63.25 ; 9.85,63.25 L3.2 ; L1.2 18,84 ; 18,84 17.5,84 ; 18,84 18.5,84 18.5,82 v1(18,82) ; 18,84 v1(18,83) ; v1(18,82) v1(17,82) v1(16,82) v1(16,83) ; v1(18,82) v1(18,83) ; 11.5,76 11.5,75 ; 7.5,65.3 9.85,65.3 9.85,64.75 ; 7.5,65.3 7.5,64.75 ; 7.5,65.3 7.5,74 ; 7.5,64 7.5,63.25 ; 7.5,64 L3.2 ; 7.5,64 7.5,64.75 ; 7.5,63.25 7.5,62.7 ; 7.5,64.75 9.85,64.75 ; 9.85,64.75 L3.2 ; v1(6,74) 6,51.45 ; v1(6,74) v1(7,74) ; 7.5,62.7 7.5,51.45 ; v1(18,83) 17.5,83 ; 11.5,75 11.5,74 7.5,74 ; v1(16,83) v1(16,84) 17.5,84 ; v1(16,83) v1(17,83) 17.5,83 ; 17.5,83 17.5,84 ; 7.5,74 v1(7,74) ; 7,51.45 v1(7,74)
  SIGNAL_3 w0.75: TH5.1 10,83 ; TH5.1 11,84 ; TH5.1 9,84 ; TH5.1 10,85 ; J3.7 109.96,9.8 ; J3.7 108.96,10.8 ; J3.7 109.96,11.8 ; J3.7 110.96,10.8 ; J3.5 106.42,10.8 ; J3.5 108.42,10.8 ; J3.5 107.42,9.8 ; J3.5 107.42,11.8 ; J3.3 104.88,11.8 ; J3.3 103.88,10.8 ; J3.3 105.88,10.8 ; J3.3 104.88,9.8
  BOTTOM w1: v1(16,83) v1(16,84) 18,84 v1(18,83) ; v1(16,83) v1(17,83) v1(18,83) ; v1(16,83) v1(16,82) v1(17,82) v1(18,82) v1(18,83) ; v1(6,74) v1(6,75) v1(6,76) v1(6,77) v1(7,77) v1(7,76) v1(7,75) v1(7,74) v1(6,74)
12VM: length 36.2
  TOP w0.5: v1(82,100) C34.2 ; R33.2 v1(70,94) ; R35.2 C33.2 v1(82,98) 82,97.41 81.5,96.91 U21.8 ; v1(77,93) 76.65,92.65 C31.1
  TOP w1: v1(53,94) v1(52,94) v1(51,94) ; v1(53,94) v1(53,93) v1(52,93) v1(51,93) ; v1(53,94) C9.1 ; v1(51,94) v1(50,94) v1(49,94) ; v1(51,94) v1(51,93) ; v1(51,94) D4.2 ; v1(49,94) R5.1 ; v1(49,94) v1(49,93) v1(50,93) v1(51,93)
  BOTTOM w1: v1(52,93) v1(53,93) v1(53,94) v1(52,94) v1(51,94) v1(50,94) v1(49,94) v1(49,93) v1(50,93) v1(51,93) v1(52,93)
0: length 112.5
  TOP w0.5: U5.5 10.73,48.73 v1(11,49) ; C32.1 v1(81,99) ; U19.2 33.63,41.63 v1(34,42) ; C3.2 81.75,87.75 v1(82,88) ; v1(44,93) 44.27,92.73 U4.5 ; C36.1 v1(39,80) 39.46,79.54 U2.9 ; U6.2 33.63,65.64 v1(34,66) ; v1(46,93) 45.54,92.54 U4.6 ; U2.7 46.81,80.81 v1(47,81) ; v1(85,72) 84.72,71.72 U1.10 ; U6.4 31.09,65.91 v1(31,66) ; U6.3 32.37,65.64 v1(32,66) ; C34.1 v1(86,100) ; U19.4 31.09,41.91 v1(31,42) ; U5.4 v1(11,50) ; U6.7 33.63,58.37 v1(34,58) 33.75,57.75 C35.1 ; v1(58,100) 58.19,99.81 U22.5 ; U21.4 74.09,93.09 v1(74,93) ; C33.1 v1(86,98) ; C22.1 33.75,33.75 v1(34,34) 33.63,34.37 U19.7 ; U4.4 v1(43,93) ; U1.20 73.28,82.28 v1(73,82) ; U3.5 34.81,73.19 v1(35,73) ; U2.13 39.46,74.46 v1(39,74) ; v1(11,47) 10.54,47.46 U5.6 ; C1.1 v1(35,74) ; v1(32,42) 32.37,41.63 U19.3 ; C37.1 55.25,92.75 v1(55,93) ; U1.11 84.72,82.28 v1(85,82) ; U1.1 73.28,71.72 v1(73,72) ; U2.11 v1(39,77) ; R34.1 v1(70,96)
  TOP w0.75: C6.2 v1(11,43) ; RV2.2 v1(92,68) ; C9.2 v1(53,100) ; D2.1 v1(11,57) ; D1.1 v1(36,93) ; RV3.2 v1(92,86) ; D4.1 v1(51,100)
  TOP w1: C8.2 v1(21,77) ; v1(20,100) C7.2 v1(16,100) ; L5.1 41.05,67 v1(40,67) v1(39,67) v1(38,67) v1(38,68) v1(39,68) v1(40,68) 41.05,68 L5.1
  TOP w1.2: C5.2 v1(64,84)
  SIGNAL_2 w0.75: R27.1 108.05,99 ; R27.1 107,97.95 ; R27.1 107,100.05 ; R27.1 105.95,99 ; R26.1 105.95,93 ; R26.1 107,94.05 ; R26.1 108.05,93 ; R26.1 107,91.95 ; J2.2 49.47,77 ; J2.2 51.02,75.45 ; J2.2 52.57,77 ; J2.2 51.02,78.55 ; TH2.1 10,87 ; TH2.1 9,88 ; TH2.1 10,89 ; TH2.1 11,88 ; TH1.1 41,72 ; TH1.1 40,71 ; TH1.1 41,70 ; TH1.1 42,71
  BOTTOM w1: v1(40,68) v1(40,67) v1(39,67) v1(38,67) v1(38,68) v1(39,68) v1(40,68)
1: length 133.3
  TOP w0.3: v1(26,15) 25.8,14.8 U8.53 ; U8.22 v1(38,10) ; U8.63 25.8,6.8 v1(26,7)
  TOP w0.5: v1(72,66) 72.19,65.81 U13.5 ; C16.1 v1(56,46) ; v1(84,29) 83.72,29.29 U9.1 ; C12.1 66.75,14.25 v1(67,14) ; C14.1 v1(52,9) ; v1(68,54) 67.81,53.81 U11.7 ; v1(72,29) 72.28,29.29 U9.10 ; v1(85,24) 85.25,23.75 C13.1 ; R14.1 v1(72,46) ; C18.1 69.25,58.75 v1(69,59) ; C41.1 v1(17,2) ; U10.16 87.53,6.47 v1(87,7) ; C38.1 C39.1 v1(17,20) ; C15.1 v1(52,13) ; C40.1 v1(17,4) ; C42.1 v1(45,10)
  TOP w0.75: C10.2 v1(61,57)
  TOP w1: U7.1 58,64.3 ; 58,64.3 v1(58,65) ; 58,64.3 C11.1 ; TR1.5 v1(49,62) ; v1(46,67) 44.95,67 L5.2 44.95,68 v1(46,68) v1(47,68) v1(48,68) v1(48,67) v1(47,67) v1(46,67) ; 62.05,44 v1(61,44) v1(60,44) v1(59,44) v1(59,43) v1(60,43) v1(61,43) 62.05,43 L7.1 62.05,44
  SIGNAL_2 w0.75: J7.6 107.42,30.12 ; J7.6 106.42,31.12 ; J7.6 108.42,31.12 ; J3.2 101.34,13.34 ; J3.2 103.34,13.34 ; J3.2 102.34,14.34 ; J3.2 102.34,12.34 ; J7.1 102.34,27.58 ; J7.1 103.34,28.58 ; J7.1 101.34,28.58 ; J7.1 102.34,29.58 ; J3.9 112.5,11.8 ; J3.9 112.5,9.8 ; J3.9 113.5,10.8 ; J3.9 111.5,10.8 ; J7.7 110.96,28.58 ; J7.7 109.96,29.58 ; J7.7 109.96,27.58 ; J7.7 108.96,28.58 ; J3.1 101.34,10.8 ; J3.1 102.34,9.8 ; J3.1 103.34,10.8 ; J3.1 102.34,11.8 ; J7.8 110.96,31.12 ; J7.8 108.96,31.12 ; J7.8 109.96,30.12 ; J7.4 103.88,31.12 ; J7.4 105.88,31.12 ; J7.4 104.88,30.12 ; J6.9 54.23,5.92 ; J6.9 56.23,5.92 ; J6.9 55.23,4.92 ; J6.9 55.23,6.92 ; J3.6 108.42,13.34 ; J3.6 106.42,13.34 ; J3.6 107.42,12.34 ; J3.6 107.42,14.34 ; TH3.1 54,52 ; TH3.1 53,53 ; TH3.1 53,51 ; TH3.1 52,52 ; J7.9 112.5,27.58 ; J7.9 113.5,28.58 ; J7.9 112.5,29.58 ; J7.9 111.5,28.58 ; J3.4 105.88,13.34 ; J3.4 103.88,13.34 ; J3.4 104.88,14.34 ; J3.4 104.88,12.34 ; J7.2 102.34,30.12 ; J7.2 101.34,31.12 ; J7.2 103.34,31.12 ; J5.6 4.45,32.35 ; J5.6 5.5,31.3 ; J5.6 5.5,33.4 ; J5.6 6.55,32.35 ; J3.8 110.96,13.34 ; J3.8 108.96,13.34 ; J3.8 109.96,12.34 ; J3.8 109.96,14.34 ; J3.10 113.5,13.34 ; J3.10 112.5,14.34 ; J3.10 112.5,12.34 ; J3.10 111.5,13.34 ; J7.10 112.5,30.12 ; J7.10 111.5,31.12 ; J7.10 113.5,31.12
  BOTTOM w1: v1(60,44) v1(61,44) v1(61,43) v1(60,43) v1(59,43) v1(59,44) v1(60,44) ; v1(47,67) v1(48,67) v1(48,68) v1(47,68) v1(46,68) v1(46,67) v1(47,67)
3: length 307.3
  TOP w0.5: U16.5 83.81,34.19 v1(84,34) ; C17.1 86.75,53.25 v1(87,53) ; C19.1 91.25,56.25 v1(91,56) ; v1(93,52) 93.09,52.09 U14.5 ; R21.1 v1(96,58) ; v1(87,41) 86.75,41.25 C20.1 ; v1(105,56) R25.1 ; U12.5 83.81,46.19 v1(84,46)
  TOP w0.75: C26.2 v1(61,33)
  TOP w1: 58,40.3 v1(58,41) ; 58,40.3 U20.1 ; 58,40.3 C24.1 ; TR3.5 v1(49,38) ; L7.2 65.95,43 v1(67,43) v1(68,43) v1(69,43) v1(69,44) v1(68,44) v1(67,44) 65.95,44 L7.2
  SIGNAL_2 w0.12: 22.2,73.2 -7.8,73.2 -7.8,67.2 22.2,67.2 ; 22.2,73.2 22.2,70.2 ; 22.2,73.2 46.2,73.2 ; 22.2,67.2 22.2,70.2 ; 22.2,67.2 46.2,67.2 ; 64.2,73.2 64.2,67.2 ; 64.2,73.2 46.2,73.2 ; 64.2,73.2 82.2,73.2 82.2,70.2 ; 64.2,67.2 46.2,67.2 ; 64.2,67.2 82.2,67.2 82.2,70.2 ; 22.2,70.2 82.2,70.2 ; 46.2,73.2 46.2,67.2
  SIGNAL_2 w0.75: TH7.1 91,42 ; TH7.1 92,43 ; TH7.1 92,41 ; TH7.1 93,42
  BOTTOM w1: v1(69,43) v1(69,44) v1(68,44) v1(67,44) v1(67,43) v1(68,43) v1(69,43)
485_EN_MASTER: length 117.5
  TOP w0.2: U11.1 67.81,46.19 v1(68,46) R14.2 ; v1(25,42) 25,33.5 18,26.5 10.25,26.5 8,24.25 v1(8,20) ; U8.4 28.4,8.6 v1(28,9)
  BOTTOM w0.2: v1(25,42) 30,47 67,47 v1(68,46) ; v1(28,9) 27,8 25.5,8 23.5,10 23.5,18.5 21.5,20.5 8.5,20.5 v1(8,20)
485_RX_MASTER: length 140.5
  TOP w0.2: U13.6 72.73,63.27 v1(72,64) R19.1 ; v1(26,9) 26.8,8.2 U8.2 ; J5.3 8.77,28 17.25,28 24,34.75 v1(24,63)
  BOTTOM w0.2: v1(26,9) 24.5,10.5 24.5,19 22,21.5 8.73,21.5 J5.3 ; v1(24,63) 26.5,65.5 70.5,65.5 v1(72,64)
485_TERM_N: length 139.3
  TOP w0.2: v1(8,43) 3,38 3,18.75 4.75,17 10.81,17 J4.1 ; FL3.2 R21.2 98.75,55.13 98.25,54.63 U14.7 93,54.63 92,53.63 v1(92,50)
  BOTTOM w0.2: v1(92,50) 15,50 v1(8,43)
485_TERM_P: length 129.4
  TOP w0.2: v1(9,43) 3.5,37.5 3.5,19 5,17.5 12.85,17.5 J4.2 ; v1(93,50) R20.2
  BOTTOM w0.2: v1(93,50) 92.5,49.5 15.5,49.5 v1(9,43)
485_TX_MASTER: length 112.1
  TOP w0.2: v1(27,9) 27.6,8.4 U8.3 ; v1(72,37) 72.27,36.73 U16.3 ; v1(24,34) 17.5,27.5 9.75,27.5 5.5,23.25 J5.2
  BOTTOM w0.2: J5.2 6.69,21 21.75,21 24,18.75 24,10.25 25.75,8.5 26.5,8.5 v1(27,9) ; v1(72,37) 70.5,35.5 25.5,35.5 v1(24,34)
A8: length 51.5
  TOP w0.2: U10.27 74.83,15.5 73.83,14.5 68.5,14.5 v1(68,15) ; U8.35 36.4,15.6 v1(37,15)
  BOTTOM w0.2: v1(37,15) 42,15 48,21 63.75,21 68,16.75 v1(68,15)
A9: length 54.8
  TOP w0.2: U10.26 76.09,15.25 74.84,14 v1(70,14) ; U8.36 35.6,15.4 v1(36,15)
  BOTTOM w0.2: v1(36,15) 36.5,15.5 41.75,15.5 47.75,21.5 64,21.5 68.5,17 68.5,15 69.5,14 v1(70,14)
A10: length 61.8
  TOP w0.2: U8.37 34.8,15.2 v1(36,14) ; v1(67,12) 67.5,12.5 77.91,12.5 79.91,14.5 U10.23
  BOTTOM w0.2: v1(67,12) 66,13 66,16 62.5,19.5 48.75,19.5 42.75,13.5 36.5,13.5 v1(36,14)
A11: length 58.1
  TOP w0.2: v1(68,14) 68.5,13.5 75.86,13.5 77.36,15 U10.25 ; v1(34,15) U8.38
  BOTTOM w0.2: v1(68,14) 67.5,14.5 67.5,16.5 63.5,20.5 48.25,20.5 42.25,14.5 34.5,14.5 v1(34,15)
A12: length 58.9
  TOP w0.2: U8.39 33.2,14.8 v1(36,12) ; U10.4 72.28,6.71 v1(72,7)
  BOTTOM w0.2: v1(36,12) 36.5,11.5 43.75,11.5 49.75,17.5 61.5,17.5 64,15 64,8.5 66,6.5 71.5,6.5 v1(72,7)
A13: length 57.1
  TOP w0.2: U8.40 32.4,14.6 v1(33,14) ; v1(71,15) 72.81,15 73.56,15.75 U10.28
  BOTTOM w0.2: v1(71,15) 70.5,14.5 69.75,14.5 69,15.25 69,17.25 64.25,22 47.5,22 41.5,16 34,16 33,15 v1(33,14)
A14: length 59.6
  TOP w0.2: U10.3 71.02,6.99 v1(71,7) ; v1(34,12) 31.6,14.4 U8.41
  BOTTOM w0.2: v1(34,12) 34.5,12.5 43.25,12.5 49.25,18.5 62,18.5 65,15.5 65,9 66.5,7.5 70.5,7.5 v1(71,7)
A15: length 68.3
  TOP w0.2: v1(32,13) 30.8,14.2 U8.42 ; U10.22 81.17,14.25 78.92,12 v1(68,12)
  BOTTOM w0.2: v1(68,12) 67.5,11.5 66.75,11.5 65.5,12.75 65.5,15.75 62.25,19 49,19 43,13 v1(32,13)
CURRENT_SEN: length 131
  TOP w0.2: U22.7 58.73,94.73 v1(58,94) R31.1 ; v1(29,84) 28,83 28,32.25 19.75,24 v1(18,24) ; v1(30,11) 30.8,10.2 U8.7
  BOTTOM w0.2: v1(30,11) 27,14 27,20.25 23.25,24 v1(18,24) ; v1(29,84) 40.5,95.5 56.5,95.5 v1(58,94)
D0: length 116
  TOP w0.2: U10.13 83.72,3.5 85.22,2 88.5,2 90.5,4 90.5,26 88,28.5 82.5,28.5 v1(82,29) 82.44,29.45 U9.2 ; U8.51 23.25,16.4 22.5,17.15 22.5,23 25.5,26 v1(27,26)
  BOTTOM w0.2: v1(82,29) 78,33 70,33 65,28 29,28 v1(27,26)
D1: length 110.7
  TOP w0.2: U8.50 23.5,17.2 23,17.7 23,22.75 25.75,25.5 27.5,25.5 v1(28,26) ; U9.3 81.17,29.18 v1(81,29) 82,28 87.75,28 90,25.75 90,4.25 88.25,2.5 85.98,2.5 84.98,3.5 U10.14
  BOTTOM w0.2: v1(28,26) 29.5,27.5 65.25,27.5 70.25,32.5 77.5,32.5 v1(81,29)
D2: length 105.5
  TOP w0.2: U8.49 23.75,18 23.5,18.25 23.5,22.5 26,25 28,25 v1(29,26) ; U9.4 79.91,29.09 v1(80,29) 81.5,27.5 87.5,27.5 89.5,25.5 89.5,4.5 88,3 86.75,3 86.25,3.5 U10.15
  BOTTOM w0.2: v1(80,29) 77,32 70.5,32 65.5,27 30,27 v1(29,26)
D3: length 81.9
  TOP w0.2: U10.17 87.53,18.5 89,19.98 89,25.25 87.25,27 81,27 v1(79,29) 78.64,29.36 U9.5 ; v1(30,26) 26,22 U8.48
  BOTTOM w0.2: v1(30,26) 30.5,26.5 65.75,26.5 70.75,31.5 76.5,31.5 v1(79,29)
D4: length 80.3
  TOP w0.2: v1(30,25) 26.8,21.8 U8.47 ; U9.6 77.36,29.36 v1(77,29) 79.5,26.5 87,26.5 88.5,25 88.5,20.75 86.25,18.5 U10.18
  BOTTOM w0.2: v1(77,29) 75,31 71,31 66,26 31,26 v1(30,25)
D5: length 78.8
  TOP w0.2: v1(30,24) 27.6,21.6 U8.46 ; U9.7 76.09,29.09 v1(76,29) 79,26 86.75,26 88,24.75 88,21 86,19 85.48,19 84.98,18.5 U10.19
  BOTTOM w0.2: v1(76,29) 74.5,30.5 71.25,30.5 66.25,25.5 31.5,25.5 v1(30,24)
D6: length 77.5
  TOP w0.2: v1(30,23) 28.4,21.4 U8.45 ; U10.20 83.72,18.5 84.72,19.5 85.75,19.5 87.5,21.25 87.5,24.5 86.5,25.5 78.5,25.5 v1(75,29) 74.83,29.18 U9.8
  BOTTOM w0.2: v1(30,23) 32,25 66.5,25 71.5,30 74,30 v1(75,29)
D7: length 76.2
  TOP w0.2: U10.21 82.44,18.5 83.94,20 85.5,20 87,21.5 87,24.25 86.25,25 78,25 v1(74,29) 73.56,29.45 U9.9 ; v1(30,22) 29.2,21.2 U8.44
  BOTTOM w0.2: v1(30,22) 32.5,24.5 66.75,24.5 71.75,29.5 73.5,29.5 v1(74,29)
PLC_EN: length 86.5
  TOP w0.2: v1(29,11) 30,10 U8.6 ; U3.3 25.5,75.73 26,75.23 26,33 18.5,25.5 16.75,25.5 16.5,25.25 16.5,24.5 v1(17,24)
  BOTTOM w0.2: v1(29,11) 26.5,13.5 26.5,20 23,23.5 17.5,23.5 v1(17,24)
PLC_RX: length 134.7
  TOP w0.2: U22.6 58.73,97.27 v1(58,98) R32.1 ; v1(28,84) 27.5,83.5 27.5,32.5 19.5,24.5 17.5,24.5 v1(17,25) ; U8.8 31.6,10.4 v1(31,11)
  BOTTOM w0.2: v1(17,25) 17.5,24.5 23.5,24.5 27.5,20.5 27.5,14.5 v1(31,11) ; v1(28,84) 40,96 56,96 v1(58,98)
PLC_TX: length 88.9
  TOP w0.2: U3.2 25.75,78.27 26.5,77.52 26.5,32.75 18.75,25 v1(18,25) ; v1(32,11) 32.4,10.6 U8.9
  BOTTOM w0.2: v1(32,11) 28,15 28,20.75 23.75,25 v1(18,25)
RESERVED0: length 87.4
  TOP w0.2: v1(61,4) 60,5 60,18.25 58.25,20 45.25,20 43.5,18.25 43.5,15.45 41.25,13.2 U8.26
  BOTTOM w0.2: J9.1 91.25,17.14 91.25,6.5 88.75,4 v1(61,4)
RESERVED1: length 85.8
  TOP w0.2: U8.25 41.25,12.4 44,15.15 44,18 45.5,19.5 58,19.5 59.5,18 59.5,4.5 v1(60,4)
  BOTTOM w0.2: v1(60,4) 60.5,3.5 89,3.5 91.75,6.25 91.75,15.1 J9.2
RESERVED2: length 85.4
  TOP w0.2: U8.30 41.25,16.4 41.5,16.65 41.5,19.25 44.25,22 60.75,22 63.5,19.25 63.5,4 v1(64.5,3)
  BOTTOM w0.2: J9.3 92.25,13.06 92.25,6 89.25,3 v1(64.5,3)
RESERVED3: length 83.8
  TOP w0.2: v1(63.5,3) 63,3.5 63,19 60.5,21.5 44.5,21.5 42,19 42,16.35 41.25,15.6 U8.29
  BOTTOM w0.2: v1(63.5,3) 64,2.5 89.5,2.5 92.75,5.75 92.75,11.02 J9.4
RESERVED4: length 68.4
  TOP w0.2: U8.12 34.8,3 35.8,2 60,2 v1(61,3)
  BOTTOM w0.2: J9.5 93.25,8.98 93.25,5.5 89.75,2 62.5,2 61.5,3 v1(61,3)
RESERVED5: length 65.4
  TOP w0.2: v1(60,3) 59.5,2.5 36.35,2.5 35.6,3.25 U8.13
  BOTTOM w0.2: v1(60,3) 60.5,2.5 61.25,2.5 62.25,1.5 90,1.5 93.75,5.25 93.75,6.94 J9.6
RESERVED6: length 66.4
  TOP w0.2: v1(61,2) 60.5,1.5 34.45,1.5 33.2,2.75 U8.10
  BOTTOM w0.2: J9.7 90.35,1 62,1 v1(61,2)
RXD: length 103.9
  TOP w0.2: TP2.1 61,6.92 61,18.5 59,20.5 45,20.5 43,18.5 43,15.75 41.25,14 U8.27
  BOTTOM w0.2: TP2.1 62.92,5 88.25,5 90.25,7 90.25,22.25 95,27 105.84,27 J7.5
SMPS24V: length 157.4
  TOP w0.635: 44.45,98 44.27,98 44.27,99 ; 44.45,99 44.27,99 ; 44.27,99 U4.10
  TOP w0.65: 77.69,68 78.36,68 U1.5
  TOP w1: FB1.1 12,40 ; 12,40 12,39.5 ; 12,40 v1(11,40) ; 12,40 12,40.5 10,40.5 v1(10,40) ; 11,39.5 v1(11,40) ; 11,39.5 v1(11,39) v1(11,38) ; 11,39.5 12,39.5 ; v1(11,40) v1(10,40) ; v1(47,99) v1(46,99) v1(45,99) 44.45,99 ; v1(47,99) v1(47,98) ; v1(47,99) 49,99 49,98 ; 12,39.5 v1(12,38) v1(11,38) ; 49,98 v1(47,98) ; 49,98 R5.2 ; v1(47,98) v1(46,98) v1(45,98) 44.45,98 ; v1(11,38) v1(10,38) v1(10,39) v1(10,40)
  TOP w1.2: 71,70.5 71,69.5 ; 71,70.5 54.98,70.5 ; 71,70.5 71,71.5 64,71.5 ; 71,69.5 54.98,69.5 ; 71,69.5 71,68 ; 64,71.5 C5.1 ; 64,71.5 54.98,71.5
  TOP w2: 77.69,68 54.98,68 54.98,68.2
  TOP w2.4: 59,71.5 59,77 57,77 ; 54.98,68.2 J2.1 57,77 ; 57,77 57,71.5
  SIGNAL_3 w0.75: TH4.1 45,70 ; TH4.1 45,72 ; TH4.1 46,71 ; TH4.1 44,71 ; J2.1 54.98,78.55 ; J2.1 56.53,77 ; J2.1 53.43,77 ; J2.1 54.98,75.45
  BOTTOM w1: v1(11,38) v1(10,38) v1(10,39) v1(10,40) v1(11,40) ; v1(11,38) v1(11,39) v1(11,40) ; v1(11,38) v1(12,38) 12,40 v1(11,40) ; v1(47,98) v1(47,99) v1(46,99) v1(45,99) v1(45,98) v1(46,98) v1(47,98)
TXD: length 100.3
  TOP w0.2: TP1.1 62,18.75 59.75,21 44.75,21 42.5,18.75 42.5,16.05 41.25,14.8 U8.28
  BOTTOM w0.2: J7.3 103.8,27.5 94.75,27.5 89.75,22.5 89.75,7.25 88,5.5 64.96,5.5 TP1.1
N09389: length 18
  TOP w0.8: 51.98,64.1 D3.2
  TOP w1: 46.99,64.54 TR1.6 ; 46.99,64.54 46.99,64.1 51.98,64.1 51.98,65 ; 46.99,64.54 46.99,65 ; 46.99,65 51.98,65 ; 46.99,65 46.99,65.5 51.98,65.5 51.98,65
N09392: length 18
  TOP w0.8: 51.98,59.9 D5.2
  TOP w1: 46.99,59.46 46.99,59 47,59 ; 46.99,59.46 46.99,59.9 51.98,59.9 51.98,59 ; 46.99,59.46 TR1.4 ; 51.98,59 51.98,58.5 47,58.5 47,59 ; 51.98,59 47,59
N09528: length 37
  TOP w1: 54.05,59.7 58,59.7 ; 54.05,59.7 54.05,60 ; 54.05,59.7 54.05,59 ; 58,59.7 C11.2 ; 58,59.7 U7.3 61.35,59.7 61.35,59 ; 53.35,60 53.35,64 D3.1 54.05,64 54.05,60 ; 53.35,60 D5.1 54.05,60 ; 53.35,60 53.35,58.5 54.05,58.5 ; 61.35,59 61.35,58.5 54.05,58.5 ; 61.35,59 54.05,59 ; 54.05,59 54.05,58.5
N35390: length 17.3
  TOP w0.2: v1(82,19) 82.44,19.45 U9.19 ; v1(82,7) 82.44,6.55 U10.12
  BOTTOM w0.2: v1(82,19) v1(82,7)
N35393: length 17.1
  TOP w0.2: U10.11 81.17,6.83 v1(81,7) ; U9.18 81.17,19.18 v1(81,19)
  BOTTOM w0.2: v1(81,19) v1(81,7)
N35399: length 17
  TOP w0.2: v1(80,19) 79.91,19.09 U9.17 ; v1(80,7) 79.91,6.91 U10.10
  BOTTOM w0.2: v1(80,19) v1(80,7)
N35402: length 17.2
  TOP w0.2: v1(79,19) 78.64,19.36 U9.16 ; U10.9 78.64,6.63 v1(79,7)
  BOTTOM w0.2: v1(79,19) v1(79,7)
N35405: length 17.2
  TOP w0.2: U9.15 77.36,19.36 v1(77,19) ; U10.8 77.36,6.63 v1(77,7)
  BOTTOM w0.2: v1(77,19) v1(77,7)
N35408: length 17
  TOP w0.2: v1(76,7) 76.09,6.91 U10.7 ; U9.14 76.09,19.09 v1(76,19)
  BOTTOM w0.2: v1(76,19) v1(76,7)
N35411: length 17.1
  TOP w0.2: v1(75,19) 74.83,19.18 U9.13 ; v1(75,7) 74.83,6.83 U10.6
  BOTTOM w0.2: v1(75,19) v1(75,7)
N35414: length 17.3
  TOP w0.2: v1(74,7) 73.56,6.55 U10.5 ; v1(74,19) 73.56,19.45 U9.12
  BOTTOM w0.2: v1(74,19) v1(74,7)
N35443: length 49
  TOP w0.2: v1(30,21) U8.43 ; U9.11 72.28,19.29 v1(72,19)
  BOTTOM w0.2: v1(72,19) 67,24 33,24 v1(30,21)
N35464: length 38.5
  TOP w0.2: v1(41,17) 40.8,17.2 U8.31 ; v1(70,16) 69.75,16.25 U10.31
  BOTTOM w0.2: v1(70,16) 70,17.75 64.75,23 47,23 v1(41,17)
N38547: length 46
  TOP w0.2: U10.29 72.28,16 71.78,15.5 70.5,15.5 v1(70,15) ; v1(38,17) U8.33
  BOTTOM w0.2: v1(70,15) 69.5,15.5 69.5,17.5 64.5,22.5 47.25,22.5 41.25,16.5 38.5,16.5 v1(38,17)
N38727: length 57.3
  TOP w0.2: v1(38,14) 38,15 37.2,15.8 U8.34 ; U10.24 78.64,14.75 76.89,13 v1(67,13)
  BOTTOM w0.2: v1(38,14) 42.5,14 48.5,20 62.75,20 66.5,16.25 66.5,13.5 v1(67,13)
N39169: length 52.7
  TOP w0.2: U8.32 39,18 38.5,17.5 38.5,12.5 v1(38,12) ; v1(70,7) 69.75,6.75 U10.2
  BOTTOM w0.2: v1(38,12) 43.5,12 49.5,18 61.75,18 64.5,15.25 64.5,8.75 66.25,7 v1(70,7)
N10841551: length 98.5
  TOP w1: 97.5,81 97.5,82 101,82 ; 97.5,81 102,81 ; 97.5,81 FL2.1 ; 116.6,80 116.6,81 ; 116.6,80 116.6,79 97.5,79 FL2.1 ; 116.6,80 102,80 ; 116.6,81 102,81 ; 116.6,81 116.6,81.12 ; 102,81 RV1.2 102,80 ; 102,81 102,82 ; 102.5,82 102,82 ; 102.5,82 116.6,82 116.6,81.12 ; 102.5,82 102.5,86 RV3.1 ; 102,82 101.75,82 ; FL2.1 102,80 ; RV3.1 101.75,82 ; RV3.1 101,86 101,82 ; 101.75,82 101,82 ; J1.1 116.6,81.12
N10842146: length 98.5
  TOP w1: 102.5,72 102.5,68 RV2.1 ; 102.5,72 116.6,72 116.6,72.88 ; 102.5,72 102,72 ; 116.6,73 116.6,74 ; 116.6,73 116.6,72.88 ; 116.6,73 102,73 ; 116.6,74 102,74 ; 116.6,74 116.6,75 97.5,75 FL1.1 ; 102,74 FL1.1 ; 102,74 RV1.1 102,73 ; RV2.1 101.75,72 ; RV2.1 101,68 101,72 ; 101,72 101.75,72 ; 101,72 97.5,72 97.5,73 ; 101.75,72 102,72 ; 116.6,72.88 J1.2 ; 102,73 97.5,73 ; 102,73 102,72 ; 97.5,73 FL1.1
N10844937: length 18.7
  TOP w0.65: 80.31,73.5 79.64,73.5 U1.6
  TOP w1: 94,74 FL1.2 ; C2.1 92,74
  TOP w2: 94,74 80.81,74 80.31,73.5
N10844940: length 27.1
  TOP w0.65: U1.4 77.09,73 76.42,73
  TOP w1: C4.1 92,80 ; 94,80 FL2.2
  TOP w2: 94,80 79.42,80 76.42,77 76.42,73
N10846204: length 47.4
  TOP w0.2: v1(47,73) 46.81,73.19 U2.1 44.5,73.19 44,73.69 44,76.5 44.5,77 U2.4 ; U1.8 82.17,68.17 v1(82,68)
  BOTTOM w0.2: v1(82,68) 81,69 51,69 v1(47,73)
N10847524: length 284.3
  TOP w0.5: C2.2 v1(91,76) ; U1.7 80.91,71.91 v1(81,72)
  BOTTOM w0.12: 46.2,67.2 22.2,67.2 ; 46.2,67.2 64.2,67.2 ; 46.2,67.2 46.2,73.2 ; 22.2,67.2 22.2,70.2 ; 22.2,67.2 -7.8,67.2 -7.8,73.2 22.2,73.2 ; 64.2,73.2 82.2,73.2 82.2,70.2 ; 64.2,73.2 64.2,67.2 ; 64.2,73.2 46.2,73.2 ; 22.2,73.2 22.2,70.2 ; 22.2,73.2 46.2,73.2 ; 22.2,70.2 82.2,70.2 ; 64.2,67.2 82.2,67.2 82.2,70.2
  BOTTOM w0.5: v1(81,72) 85,76 v1(91,76)
N10847531: length 14.3
  TOP w0.5: C4.2 v1(91,78) ; U1.14 80.91,82.09 v1(81,82)
  BOTTOM w0.5: v1(81,82) 85,78 v1(91,78)
N10852000: length 20.7
  TOP w0.2: v1(47,78) 46.73,78.27 U2.5 ; R1.1 v1(35,76) 34.73,75.73 U3.6
  BOTTOM w0.2: v1(47,78) 46,79 34.75,79 34,78.25 34,77 v1(35,76)
N10855610: length 45.7
  TOP w0.2: v1(47,75) 46.46,74.46 U2.2 ; v1(82,86) 82.17,85.83 U1.13
  BOTTOM w0.2: v1(47,75) 48,76 48,79.5 53.5,85 81,85 v1(82,86)
N10855613: length 36.5
  TOP w0.2: v1(47,80) 46.54,79.54 U2.6 ; v1(77,86) 77.09,85.91 U1.17
  BOTTOM w0.2: v1(77,86) 53,86 v1(47,80)
N10855616: length 2.8
  TOP w0.5: C3.1 79.64,85.89 U1.15
N10857224: length 58.2
  TOP w0.635: 41.73,99 41.73,98 ; 41.73,99 U4.12 ; 41.73,99 41.55,99 ; 41.73,98 41.55,98 ; 41.73,98 41.73,97 41.55,97
  TOP w1: L4.1 29,99 ; L4.1 28.25,100.15 ; L4.1 29.75,100.15 ; 29,99 29.75,99 ; 29,99 28.25,99 ; 27.7,98 27.7,97 36,97 ; 27.7,98 27.7,99 ; 27.7,98 36,98 ; 36,99 36,98 ; 36,99 30.3,99 ; 36,99 41.55,99 ; 36,98 36,97 ; 36,98 41.55,98 ; 29.75,99 29.75,100.15 ; 29.75,99 30.3,99 ; 29.75,100.15 30.3,100.15 30.3,99 ; 27.7,99 27.7,100.15 28.25,100.15 ; 27.7,99 28.25,99 ; 28.25,100.15 28.25,99 ; 41.55,97 36,97 ; 36,97 D1.2
N10857508: length 110.9
  TOP w0.635: 41.73,89.5 U4.3 ; 41.73,89.5 41.55,89.5 ; 41.73,89.5 41.73,89 ; 41.73,89 41.73,87.95 41.4,87.95 ; 41.73,89 41.55,89
  TOP w1: 30.3,89.5 30.3,91.85 29.75,91.85 ; 30.3,89.5 29.75,89.5 ; 30.3,89.5 41.55,89.5 ; 20,93.5 19,93.5 ; 20,93.5 20,89.5 ; 20,93.5 21,93.5 21,89.5 ; 19,93.5 19,89.5 ; 19,93.5 18,93.5 C7.1 ; 21,89.5 27.7,89.5 ; 21,89.5 20,89.5 ; 27.7,89.5 28.25,89.5 ; 27.7,89.5 27.7,91.85 28.25,91.85 ; L4.2 29,89.5 ; L4.2 28.25,91.85 ; L4.2 29.75,91.85 ; 29,89.5 29.75,89.5 ; 29,89.5 28.25,89.5 ; 29.75,91.85 29.75,89.5 ; 28.25,91.85 28.25,89.5 ; 19,89.5 17.5,89.5 17.5,89 ; 19,89.5 20,89.5 ; 41.55,89 17.5,89 ; 17.5,89 17.5,87.95 L1.1
  TOP w1.2: 18,89.5 C7.1
  TOP w1.3: L1.1 L2.1 41.4,87.95
N10865568: length 17.1
  TOP w0.2: v1(47,76) 46.73,75.73 U2.3 ; U3.7 34.73,78.27 v1(35,78) R2.1
  BOTTOM w0.2: v1(35,78) 45,78 v1(47,76)
N10867072: length 3
  TOP w0.2: R3.1 23,80 23.81,80.81 U3.1
N10870573: length 15.2
  TOP w0.635: 34.91,65 U6.1 34.91,64.1 35.09,64.1 ; 34.91,65 34.91,65.5 35.09,65.5 ; 34.91,65 35.09,65
  TOP w1: 39.01,64.54 39.01,64.1 35.09,64.1 ; 39.01,64.54 TR1.1 ; 39.01,64.54 39.01,65 39,65 ; 39,65 35.09,65 ; 39,65 39,65.5 35.09,65.5
N10870576: length 15.2
  TOP w0.635: 34.91,59 34.91,58.5 35.09,58.5 ; 34.91,59 U6.8 34.91,59.9 35.09,59.9 ; 34.91,59 35.09,59
  TOP w1: TR1.3 39.01,59.46 ; 39.01,59.46 39.01,59.9 35.09,59.9 ; 39.01,59.46 39.01,59 39,59 ; 39,59 35.09,59 ; 39,59 39,58.5 35.09,58.5
N10877738: length 16.3
  TOP w0.2: C14.2 Y1.2 48,9.8 47,10.8 U8.23
N10877750: length 15.9
  TOP w0.2: U8.24 47,11.6 48,12.6 Y1.1 C15.2
N10878472: length 51.1
  TOP w0.2: R13.1 v1(41,8) 40.6,8.4 U8.20
  BOTTOM w0.2: J5.5 12.81,22.5 22.5,22.5 25.5,19.5 25.5,13 30,8.5 40.5,8.5 v1(41,8)
N10878665: length 44
  TOP w0.2: v1(34,8) U8.11
  BOTTOM w0.2: v1(34,8) 29.75,8 25,12.75 25,19.25 22.25,22 10.77,22 J5.4
N10882240: length 18
  TOP w0.8: 51.98,35.9 D8.2
  TOP w1: 46.99,35.46 TR3.4 ; 46.99,35.46 46.99,35 47,35 ; 46.99,35.46 46.99,35.9 51.98,35.9 51.98,35 ; 47,35 47,34.5 51.98,34.5 51.98,35 ; 47,35 51.98,35
N10882264: length 37
  TOP w1: 53.35,36 53.35,40 D7.1 54.05,40 54.05,36 ; 53.35,36 D8.1 54.05,36 ; 53.35,36 53.35,34.5 54.05,34.5 ; 61.35,35 61.35,34.5 54.05,34.5 ; 61.35,35 54.05,35 ; 61.35,35 61.35,35.7 U20.3 58,35.7 ; 58,35.7 C24.2 ; 58,35.7 54.05,35.7 ; 54.05,35 54.05,35.7 ; 54.05,35 54.05,34.5 ; 54.05,35.7 54.05,36
N10882308: length 15.2
  TOP w0.635: 34.91,35 34.91,34.5 35.09,34.5 ; 34.91,35 35.09,35 ; 34.91,35 U19.8 34.91,35.9 35.09,35.9
  TOP w1: 35.09,34.5 39,34.5 39,35 ; 35.09,35.9 39.01,35.9 39.01,35.46 ; 39,35 39.01,35 39.01,35.46 ; 39,35 35.09,35 ; TR3.3 39.01,35.46
N10882312: length 18
  TOP w0.8: 51.98,40.1 D7.2
  TOP w1: 46.99,41 46.99,41.5 51.98,41.5 51.98,41 ; 46.99,41 46.99,40.54 ; 46.99,41 51.98,41 ; 51.98,41 51.98,40.1 46.99,40.1 46.99,40.54 ; 46.99,40.54 TR3.6
N10882400: length 15.2
  TOP w0.635: 35.09,40.1 34.91,40.1 U19.1 34.91,41 ; 34.91,41 35.09,41 ; 34.91,41 34.91,41.5 35.09,41.5
  TOP w1: 39,41 39,41.5 35.09,41.5 ; 39,41 35.09,41 ; 39,41 39.01,41 39.01,40.54 ; 35.09,40.1 39.01,40.1 39.01,40.54 ; TR3.1 39.01,40.54
N10895652: length 22
  TOP w0.2: U14.4 88.5,52.09 88,51.59 88,39 87,38 85.75,38 85.25,37.5 R24.2 84,36 83.27,36.73 U16.6
N10895660: length 13.1
  TOP w0.2: U14.1 88.5,55.91 88,56.41 88,62 86.73,63.27 U13.3
N10895700: length 3
  TOP w0.2: R18.1 84,60 83.27,60.73 U13.2
N10895720: length 13.6
  TOP w0.2: U14.2 88.5,54.63 88,54.13 88,53.37 ; 88,53.37 88,52.75 87.25,52 R22.1 86.75,50.75 85.25,49.25 R15.2 84,48 83.27,48.73 U12.6 ; 88,53.37 U14.3
N10895736: length 3
  TOP w0.2: R23.1 72,40 72.73,39.27 U16.2
N10895740: length 27.3
  TOP w0.2: J8.3 118.5,44.25 118.5,51.25 116.5,53.25 R25.2 103.42,53.25 103.17,53.5 U15.3
N10895768: length 9.6
  TOP w0.2: U14.6 98.25,53.37 98.75,52.87 R17.1 R20.1 FL4.2
N10895776: length 17.9
  TOP w0.2: U15.1 100.83,56 101.33,56.5 102.42,56.5 102.92,57 FL3.1 116,58 J8.1
N10895804: length 17.6
  TOP w0.2: U15.2 100.83,52 101.33,51.5 102.42,51.5 102.92,51 FL4.1 J8.2
N10895892: length 3
  TOP w0.2: U12.2 72.73,51.27 72,52 R16.1
N10899790: length 7.3
  TOP w0.2: U12.3 72,48.73 70.73,47.46 U11.2
N10905190: length 29.2
  TOP w0.2: v1(37,10) 36.4,9.4 U8.14
  BOTTOM w0.2: J6.2 56.44,14.75 50,14.75 45.75,10.5 37.5,10.5 v1(37,10)
N10905845: length 27.4
  TOP w0.2: v1(37,9) 37.2,8.8 U8.15
  BOTTOM w0.2: J6.4 56.48,12.25 50,12.25 47.25,9.5 37.5,9.5 v1(37,9)
N10905855: length 25.3
  TOP w0.2: v1(38,9) U8.16
  BOTTOM w0.2: J6.6 56.52,9.75 50,9.75 49.25,9 v1(38,9)
N10912524: length 26.7
  TOP w0.2: U8.60 23.25,9.2 21,6.95 v1(21,6) R12.2
  BOTTOM w0.2: J4.3 13.19,15 21.25,15 22.5,13.75 22.5,7.5 v1(21,6)
N10912530: length 24.4
  TOP w0.2: R11.2 v1(21,8) 23,10 U8.59
  BOTTOM w0.2: J4.5 13,12.27 13,14 13.5,14.5 21,14.5 22,13.5 22,9 v1(21,8)
N10912536: length 20.2
  TOP w0.2: U8.58 21.8,10.8 v1(21,10) R10.2
  BOTTOM w0.2: v1(21,10) 21.5,10.5 21.5,12.25 20.75,13 16.5,13 15.5,12 15.5,10.5 15,10 13.27,10 J4.7
N10912542: length 18.9
  TOP w0.2: U8.57 21.4,11.6 v1(21,12) R9.2
  BOTTOM w0.2: v1(21,12) 20.5,12.5 16.75,12.5 16,11.75 16,10.25 15.25,9.5 13.5,9.5 13,9 13,7.19 J4.9
N10912548: length 16.9
  TOP w0.2: J4.10 16.5,8.15 16.5,12.5 17,13 19.25,13 19.75,13.5 R8.2 20.5,14 22.1,12.4 U8.56
N10912554: length 17
  TOP w0.2: J4.8 16,10.19 16,14.25 16.75,15 19.25,15 19.75,15.5 R7.2 20.5,16 23.3,13.2 U8.55
N10912561: length 17.7
  TOP w0.2: J4.6 15.5,12.23 15.5,16 16.5,17 19.25,17 19.75,17.5 R6.2 20.5,18 21,17.5 21,16.5 23.5,14 U8.54
N10952342: length 3
  TOP w0.2: U3.4 23.81,73.19 23,74 R4.1
N10987418: length 31.8
  TOP w0.635: 17,48.55 17,48.73 ; 17,48.73 U5.10 ; 17,48.73 16,48.73 16,48.55
  TOP w1: v1(16,46) v1(16,47) v1(16,48) 16,48.55 ; v1(16,46) v1(16,45) 16,43 ; v1(16,46) v1(17,46) ; v1(17,46) v1(17,45) 17,39.5 15.95,39.5 FB1.2 16,40 16,43 ; v1(17,46) v1(17,47) v1(17,48) 17,48.55 ; 16,43 C6.1
  BOTTOM w1: v1(16,46) v1(16,45) v1(17,45) v1(17,46) v1(17,47) v1(17,48) v1(16,48) v1(16,47) v1(16,46)
N10987474: length 58.2
  TOP w0.635: 15,51.45 15,51.27 16,51.27 ; 16,51.27 16,51.45 ; 16,51.27 17,51.27 ; 17,51.27 17,51.45 ; 17,51.27 U5.12
  TOP w1: L3.1 18.15,64.75 ; L3.1 17,64 ; L3.1 18.15,63.25 ; 18.15,64.75 18.15,65.3 17,65.3 ; 18.15,64.75 17,64.75 ; 15,57 15,65.3 16,65.3 ; 15,57 17,57 ; 15,57 15,51.45 ; 15,57 D2.2 ; 17,64 17,64.75 ; 17,64 17,63.25 ; 17,64.75 17,65.3 ; 17,57 17,62.7 ; 17,57 17,51.45 ; 17,62.7 17,63.25 ; 17,62.7 18.15,62.7 18.15,63.25 ; 17,63.25 18.15,63.25 ; 17,65.3 16,65.3 ; 16,65.3 16,51.45
N11012209: length 15.9
  TOP w0.2: v1(67,97) 67.27,97.27 U22.3 ; v1(79,96) 79.36,95.64 U21.7
  BOTTOM w0.2: v1(67,97) 67.5,96.5 78.5,96.5 v1(79,96)
N11012213: length 2.8
  TOP w0.2: U22.4 68.6,100 R29.1
N11012385: length 2.8
  TOP w0.2: R30.1 68.6,92 U22.1
N11012421: length 11.2
  TOP w0.2: v1(74,96) 74,96.5 74.41,96.91 U21.1 ; v1(67,95) 67.27,94.73 U22.2
  BOTTOM w0.2: v1(74,96) 73.5,95.5 67.5,95.5 v1(67,95)
N11012477: length 4.7
  TOP w0.2: 72.75,94.36 R33.1 ; 72.75,94.36 U21.3 ; 72.75,94.36 R34.2
N11012557: length 46.4
  TOP w0.5: U21.6 81.64,94.36 v1(82,94) R36.1 ; R28.2 v1(70,98)
  TOP w0.65: U1.16 78.36,87.64 v1(78,88)
  BOTTOM w1.4: v1(70,98) 80,98 82,96 v1(82,94) 82,91 ; v1(78,88) 78,89.5 79.5,91 82,91 ; R27.2 R26.2 87,91 82,91
N11012561: length 8
  TOP w0.2: R37.1 83.25,91.5 82.75,91 C31.2 79.25,91 79.25,92.84 79.5,93.09 U21.5
N11012633: length 4
  TOP w0.2: R35.1 R36.2 R37.2
N11012693: length 9.3
  TOP w0.2: R28.1 72.75,98.5 73.25,99 C32.2 76.75,99 76.75,95.89 76.5,95.64 U21.2

## Copper pours and planes (outline as drawn; the poured copper is in the pictures)
5VL1 on SIGNAL_3 (solid shape): 74.75,39.1 73.9,38.25 68.1,38.25 67.25,39.1 67.25,41.1 66.1,42.25 59.9,42.25 58.75,41.1 58.75,32.9 59.9,31.75 88.75,31.75 88.75,6.1 87.9,5.25 17.1,5.25 16.25,6.1 16.25,17.1 15.1,18.25 5.1,18.25 4.25,19.1 4.25,25.75 50.1,25.75 51.25,26.9 51.25,64.9 52.1,65.75 74.75,65.75
